# Altium PCB PCB1.PcbDoc (part 1 of 3)
Units mil, origin at the board's own origin, x right, y up, seen from the top; angles counter-clockwise.
Board outline 5410 x 4000 mil, 10 copper layers (Top Layer 1, Top Layer, Layer 5, Layer 3, Layer 1, Layer 2, Layer 4, Layer 6, Bottom Layer, Bottom Layer 1), stack 48.824 mil thick; 53 components, 189 nets, 458 pads, 144 vias.
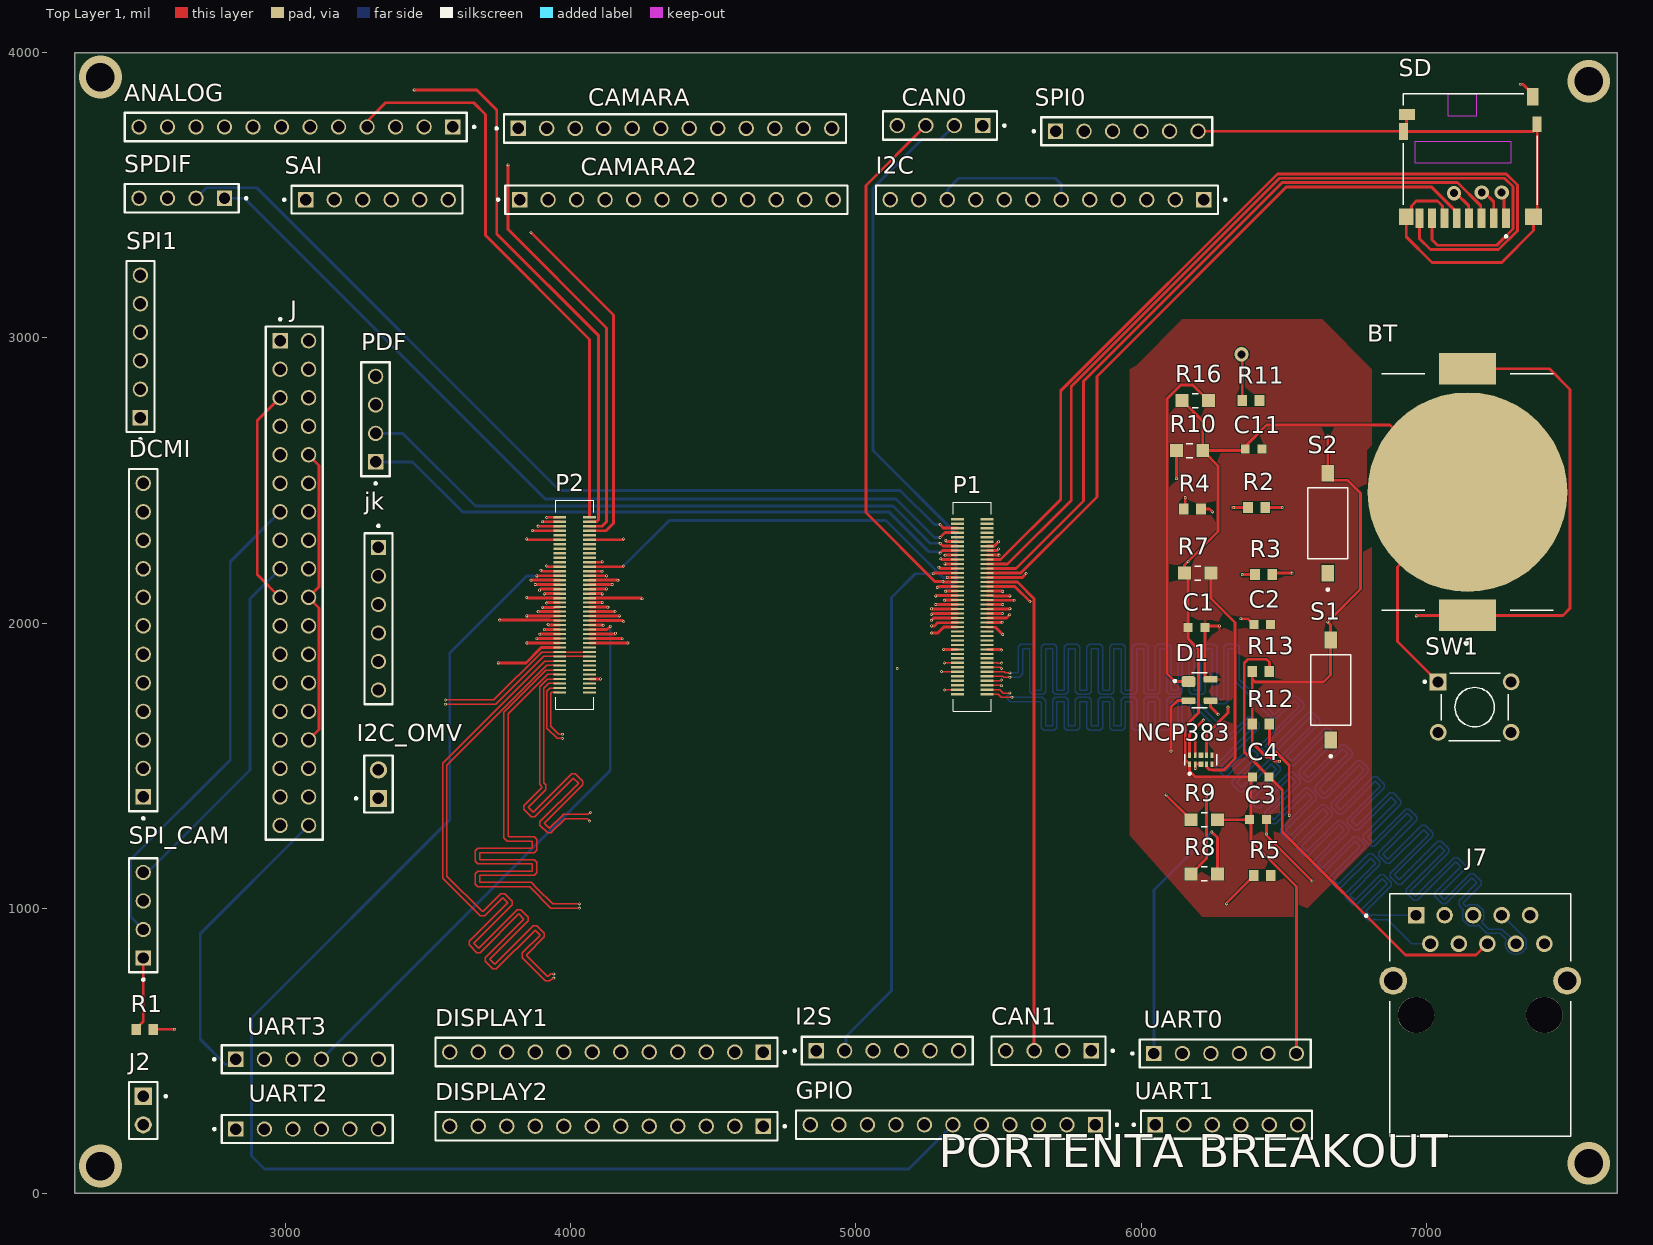
[diagram p0: Top Layer 1 view]
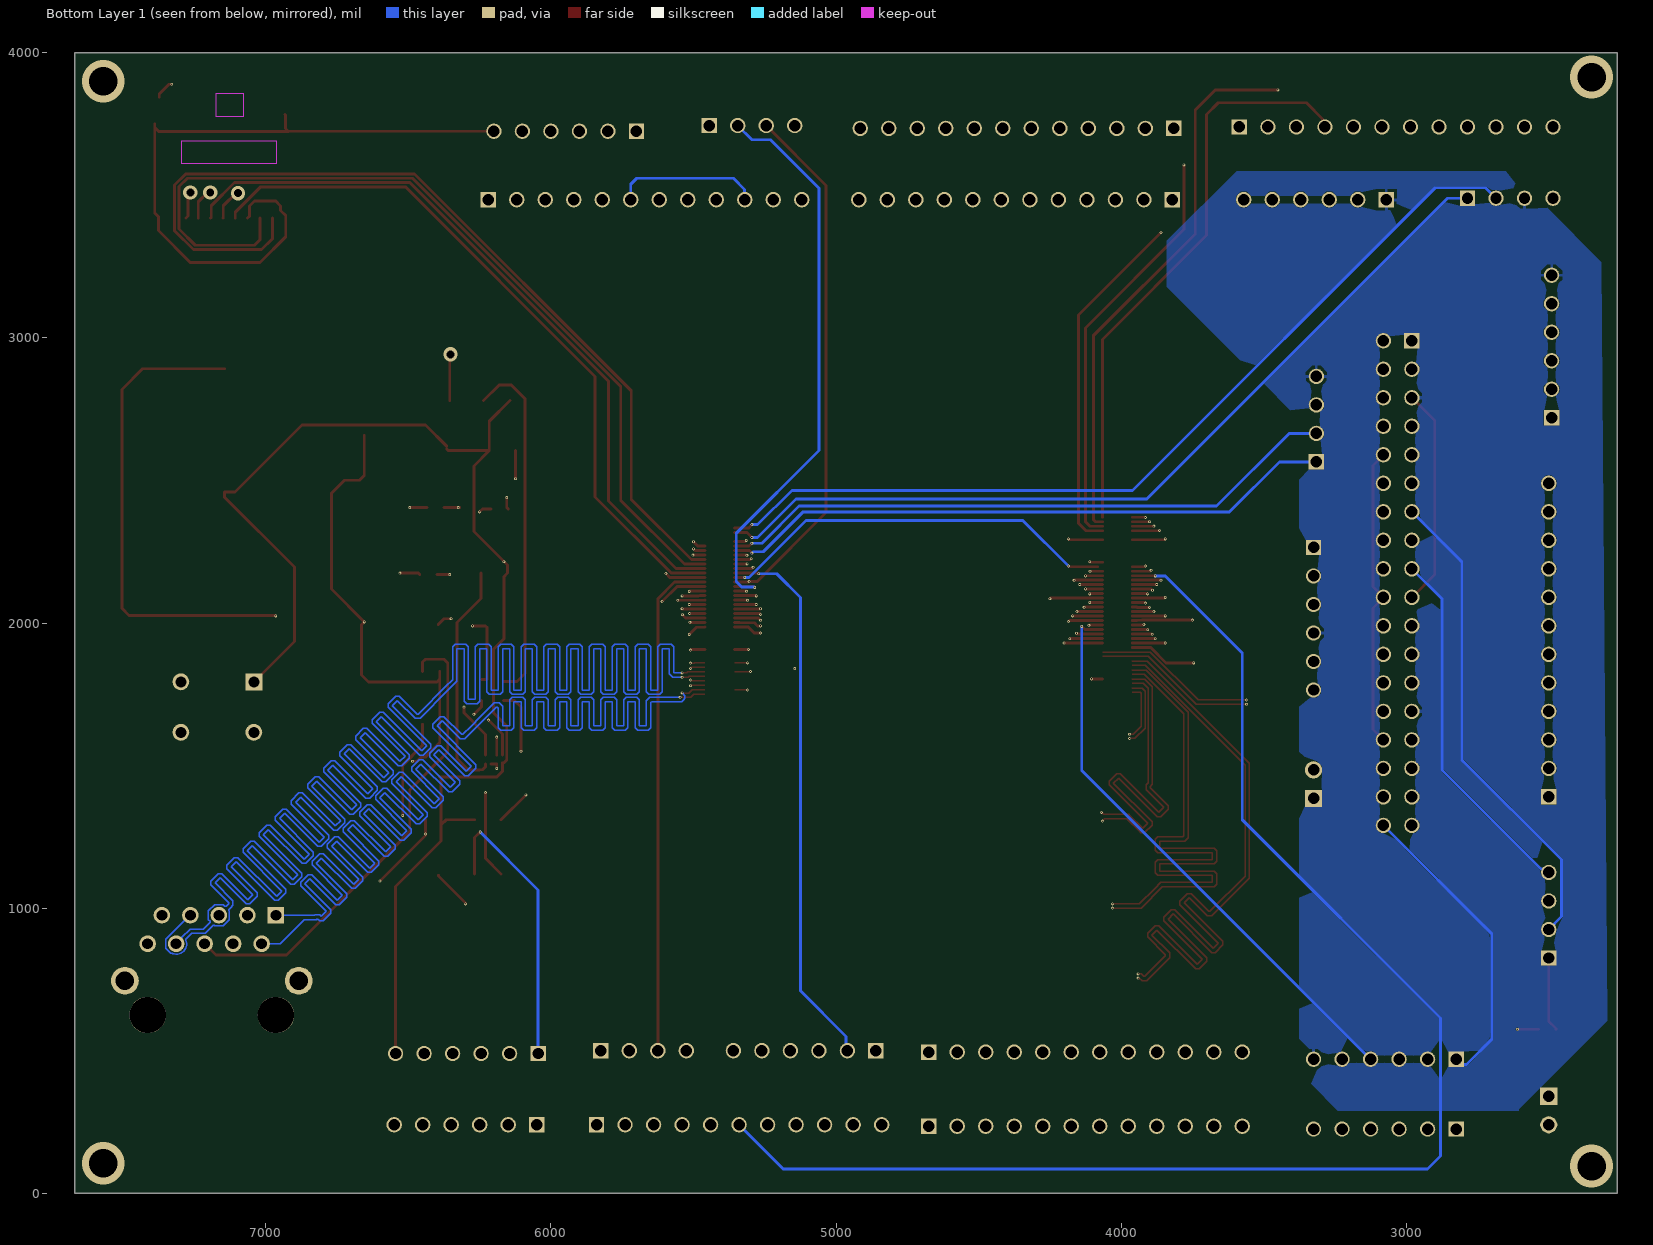
[diagram p1: Bottom Layer 1 view, seen from below]
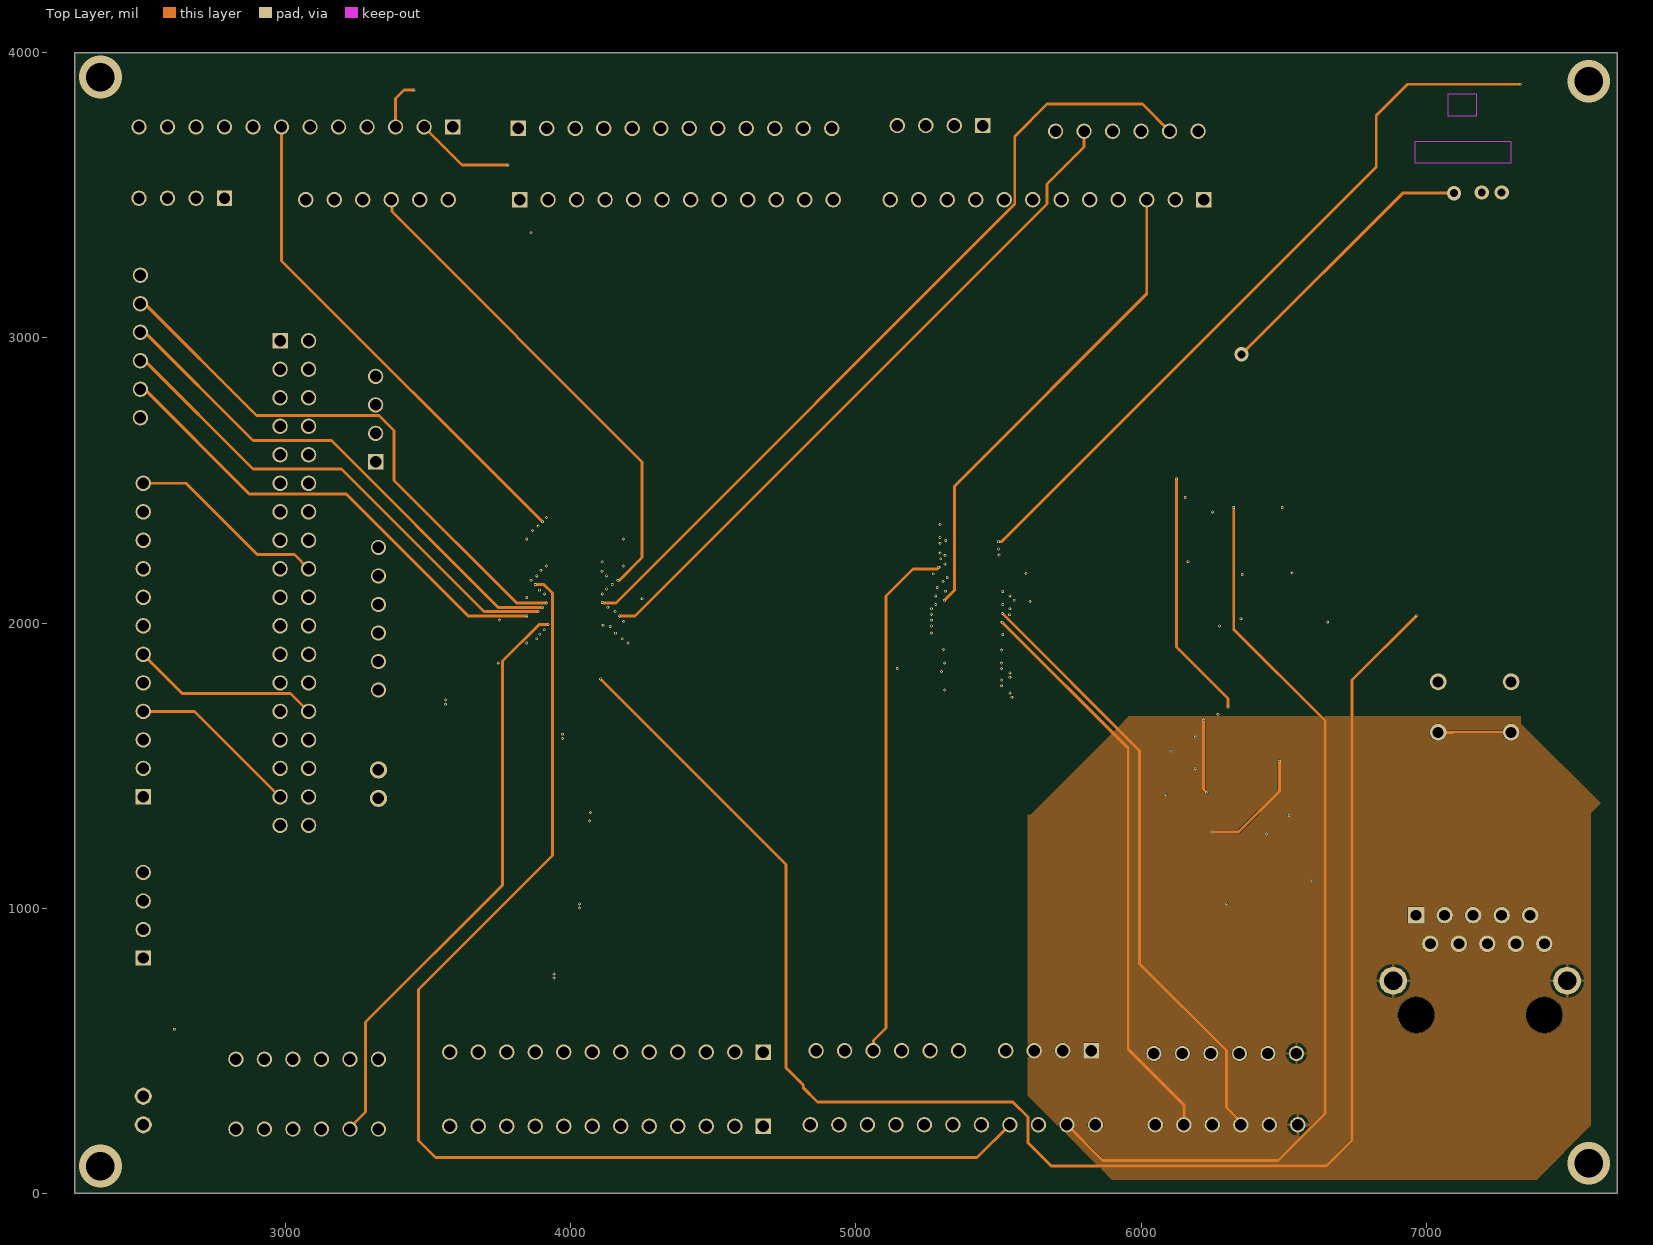
[diagram p2: Top Layer]
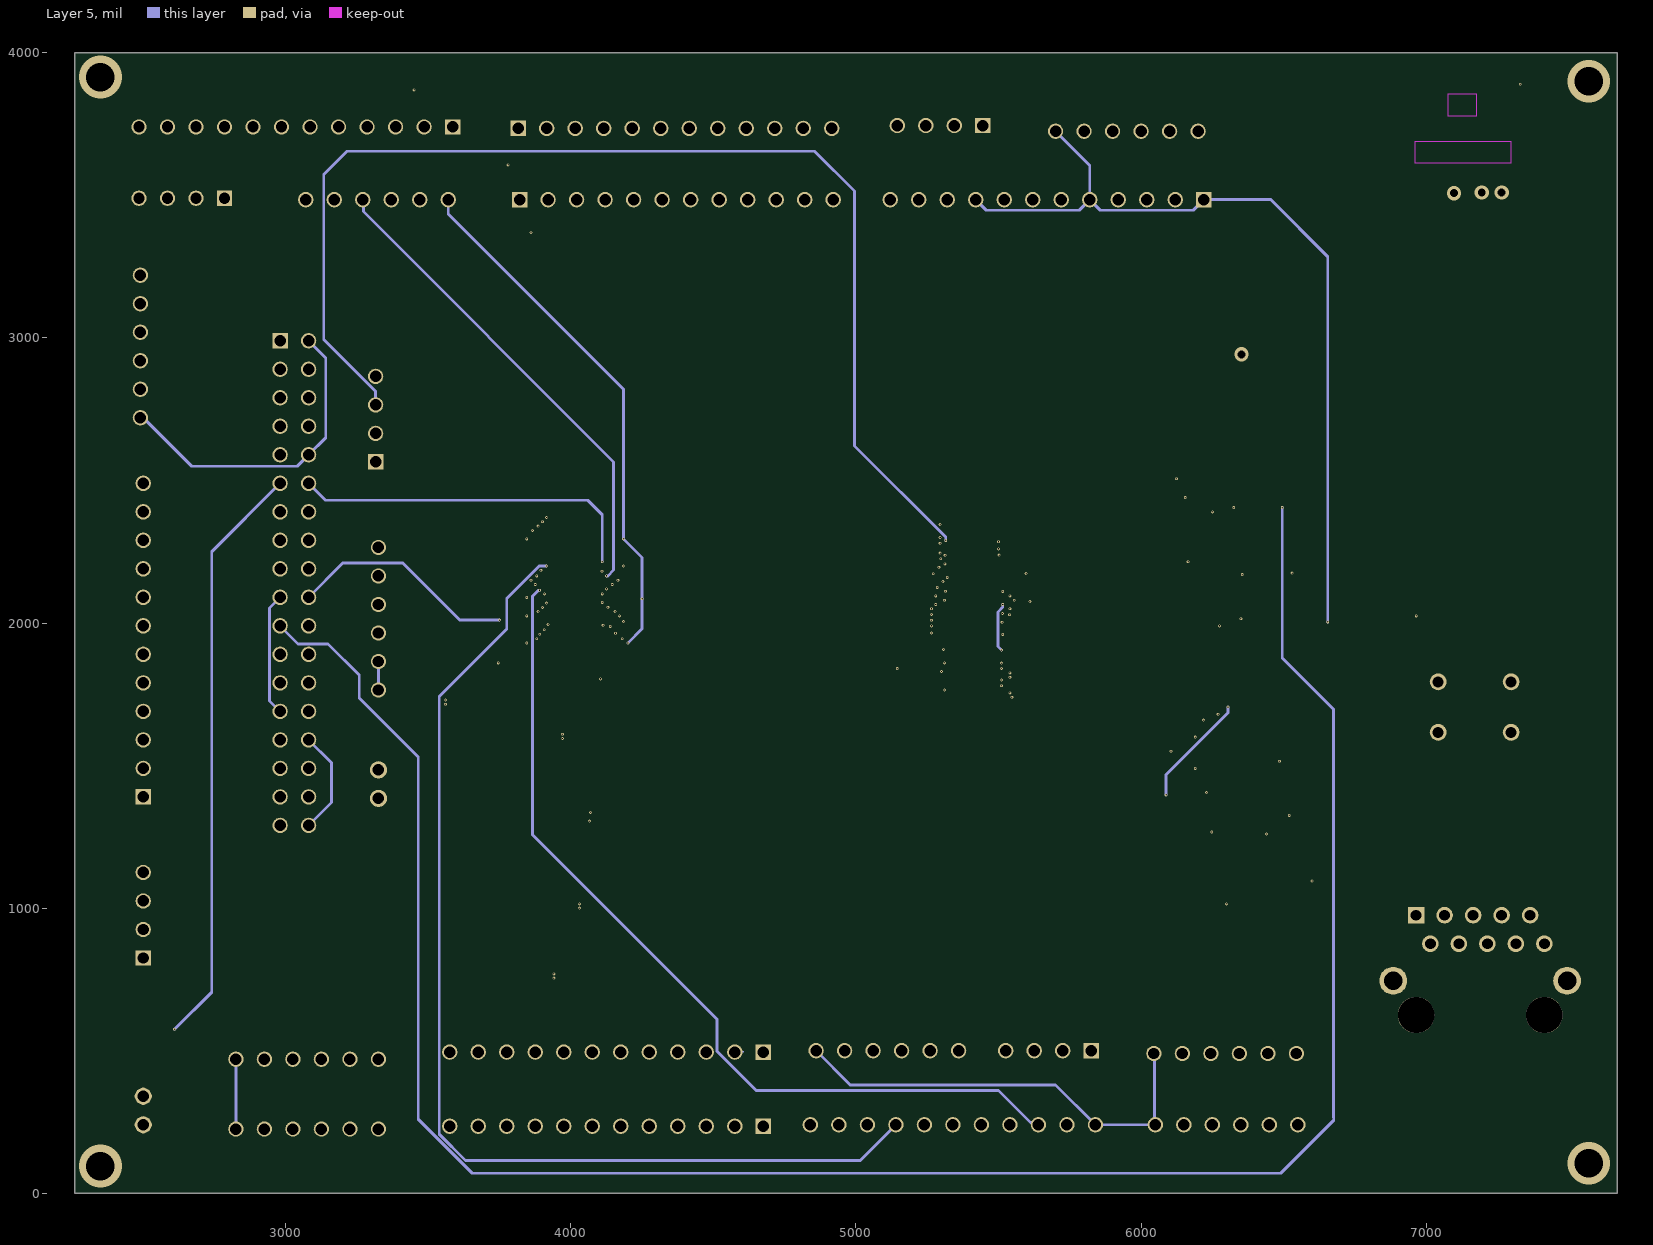
[diagram p3: Layer 5]
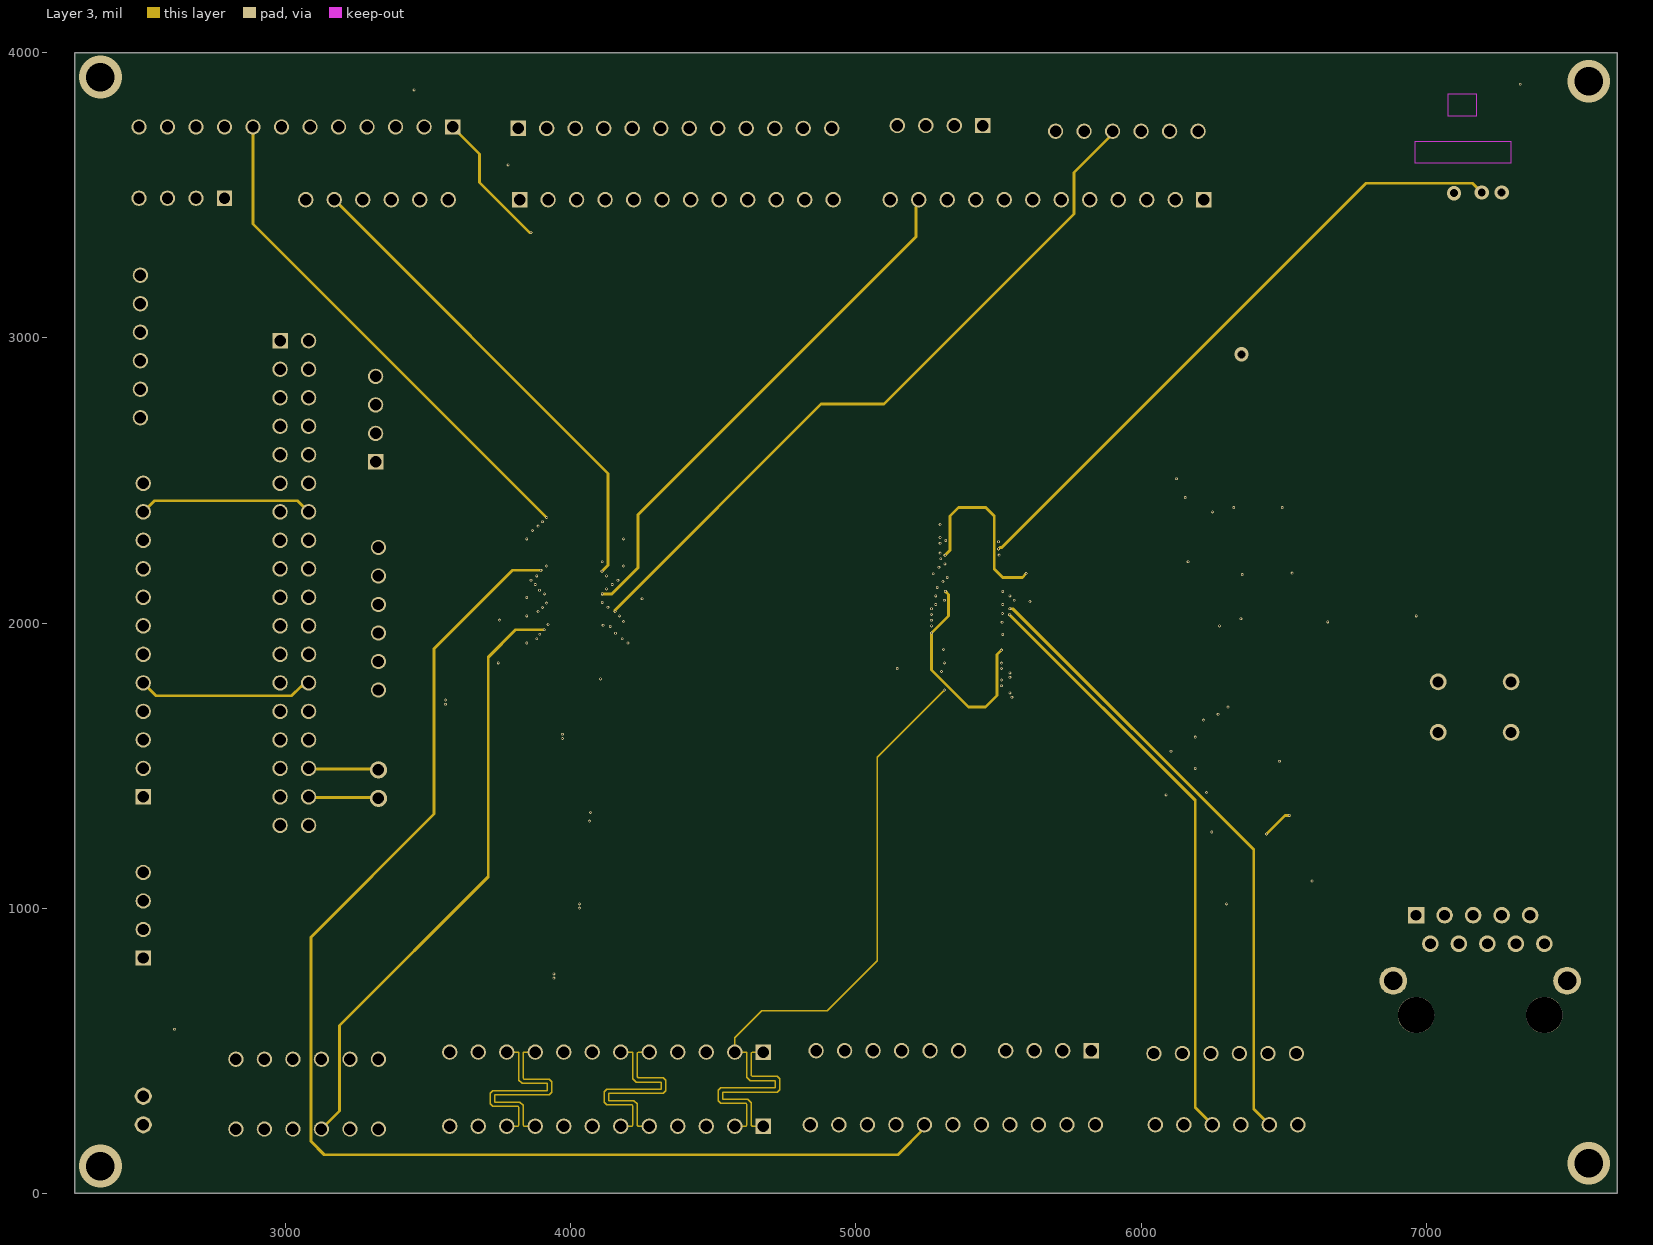
[diagram p4: Layer 3]
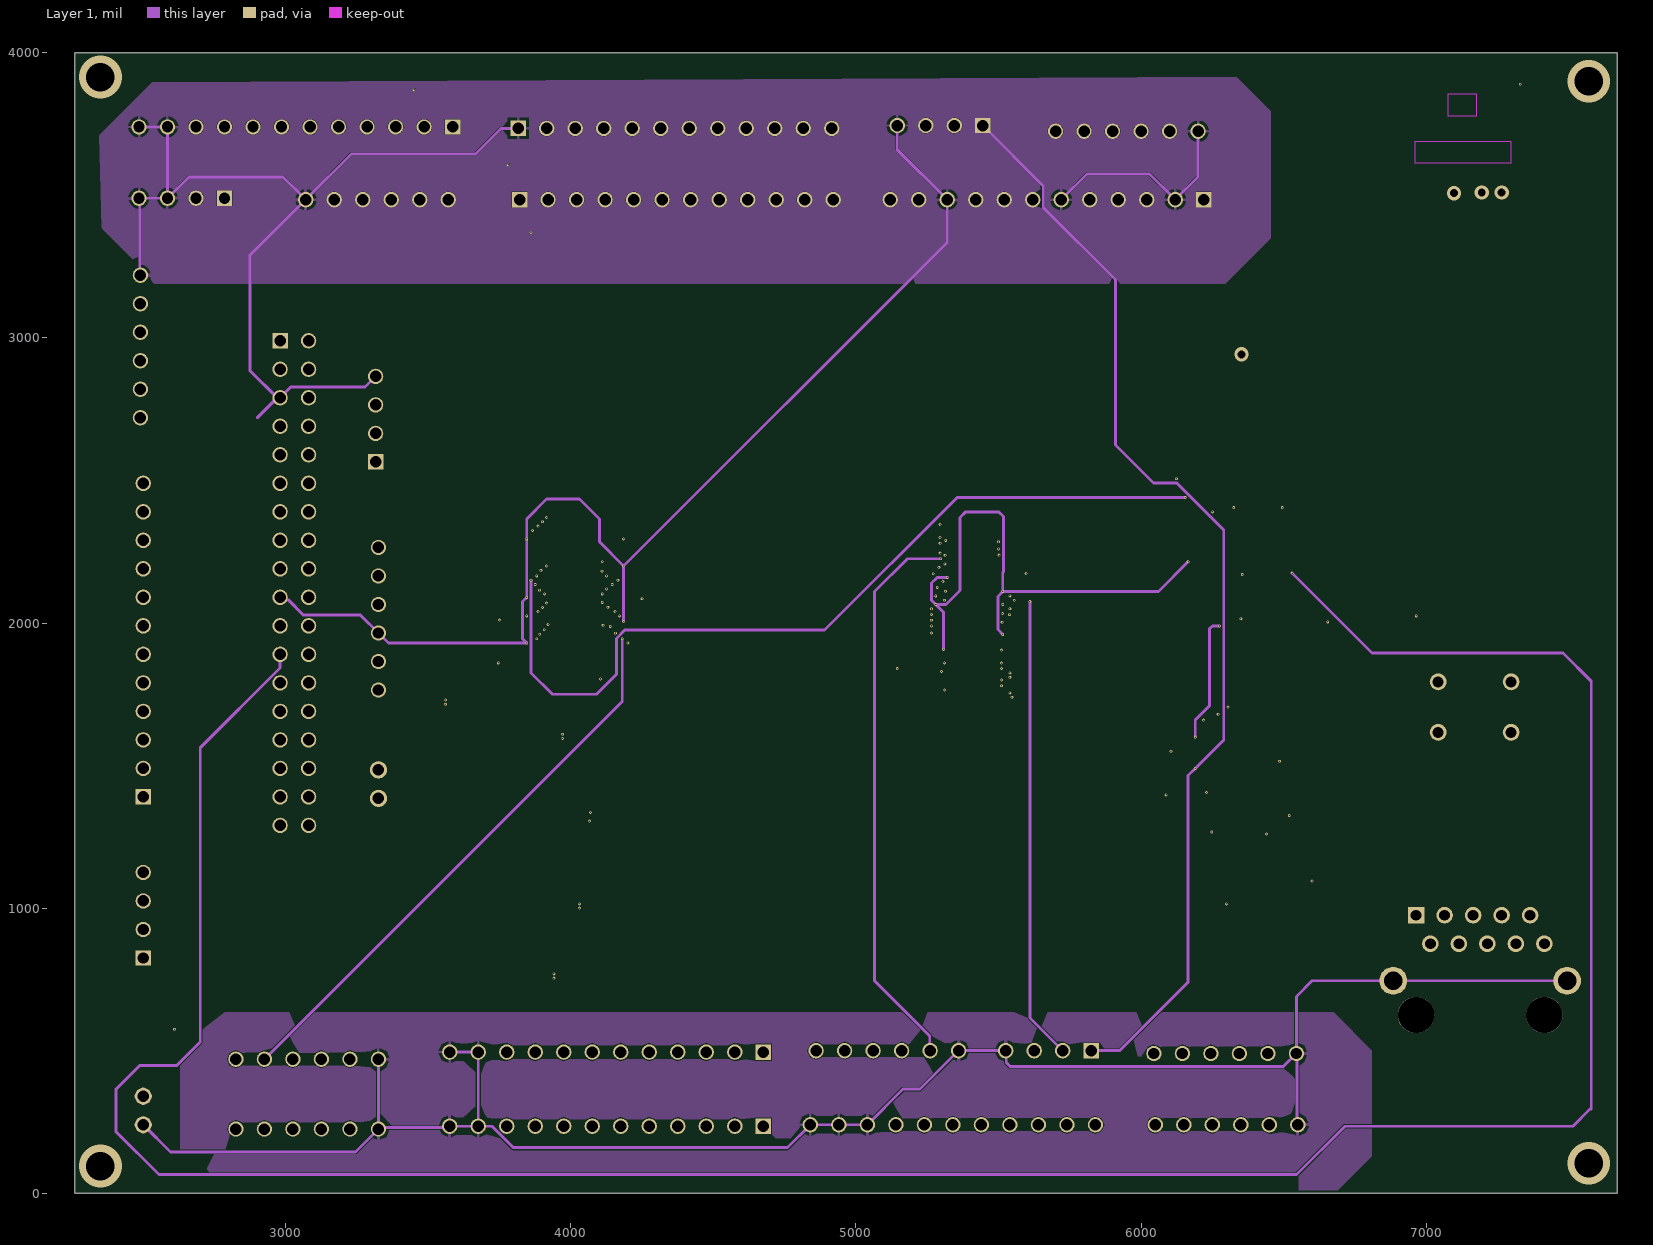
[diagram p5: Layer 1]
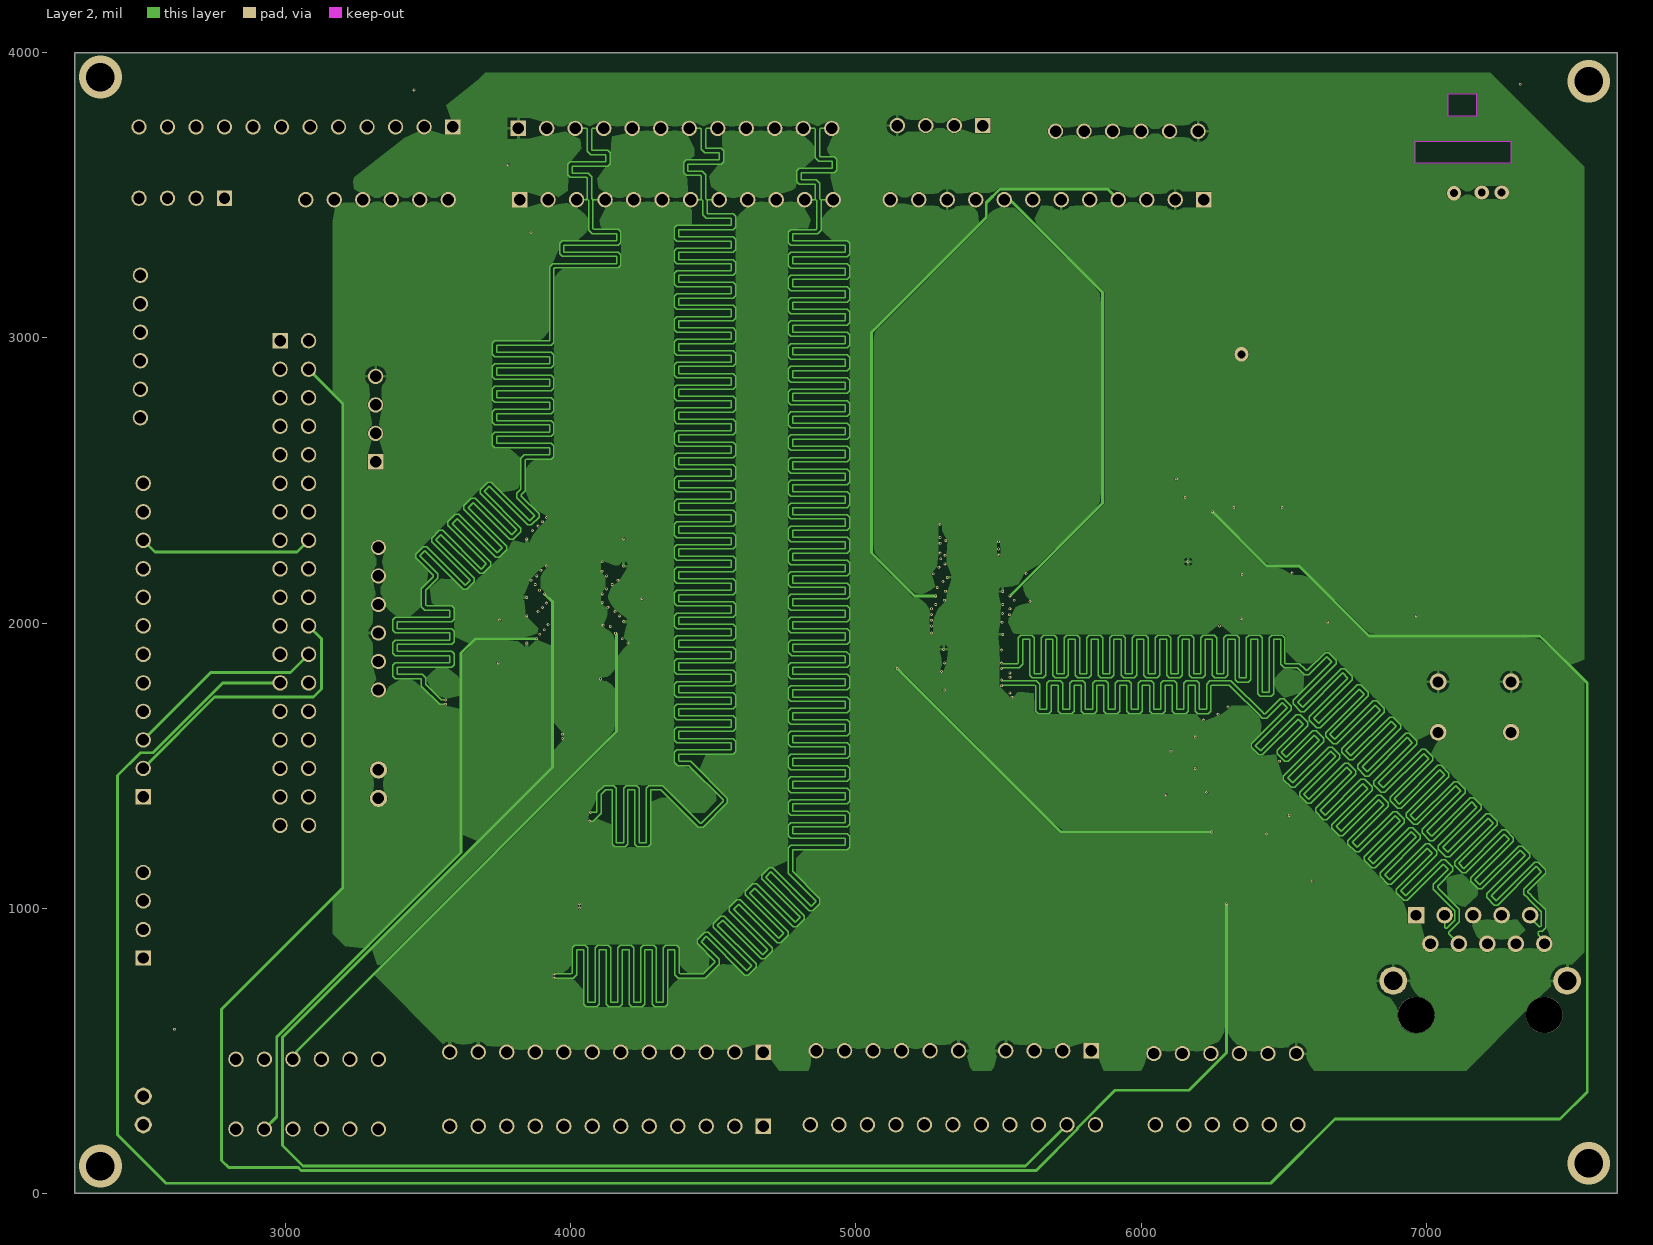
[diagram p6: Layer 2]
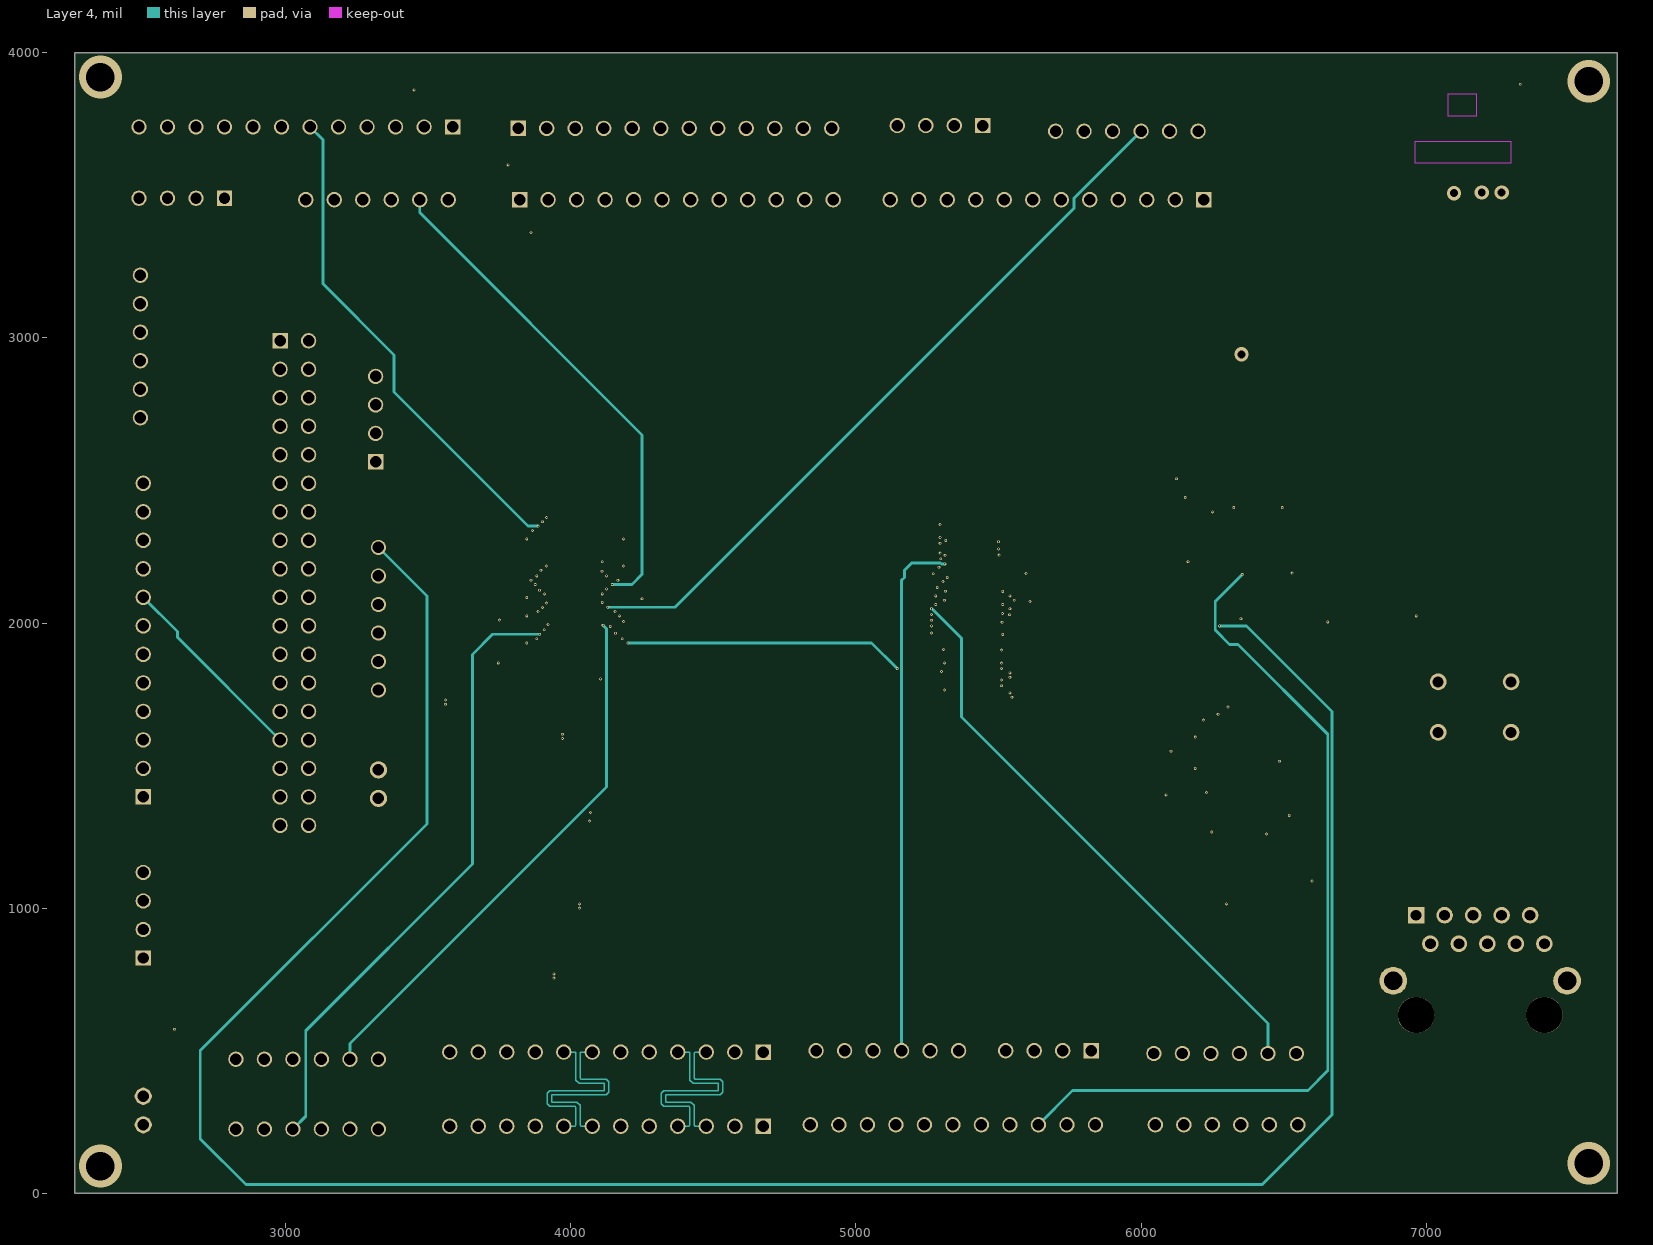
[diagram p7: Layer 4]
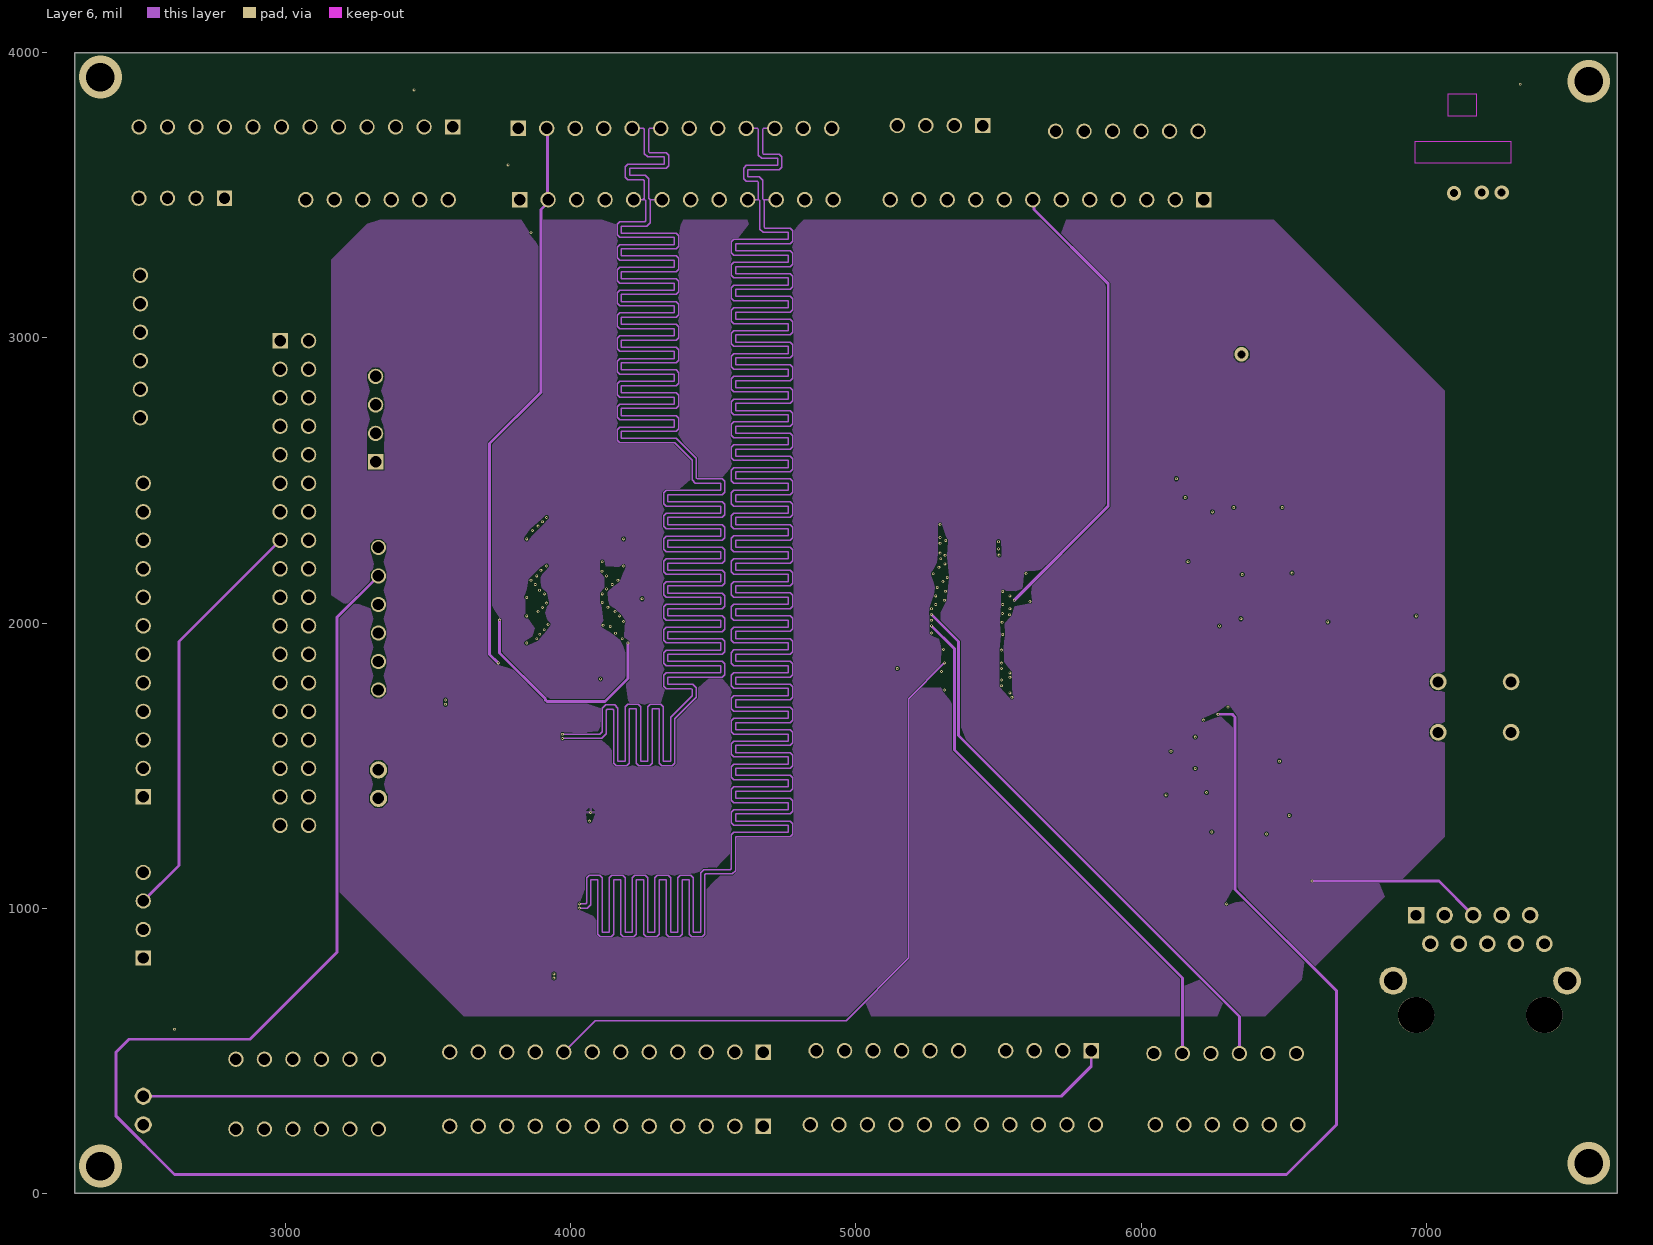
[diagram p8: Layer 6]
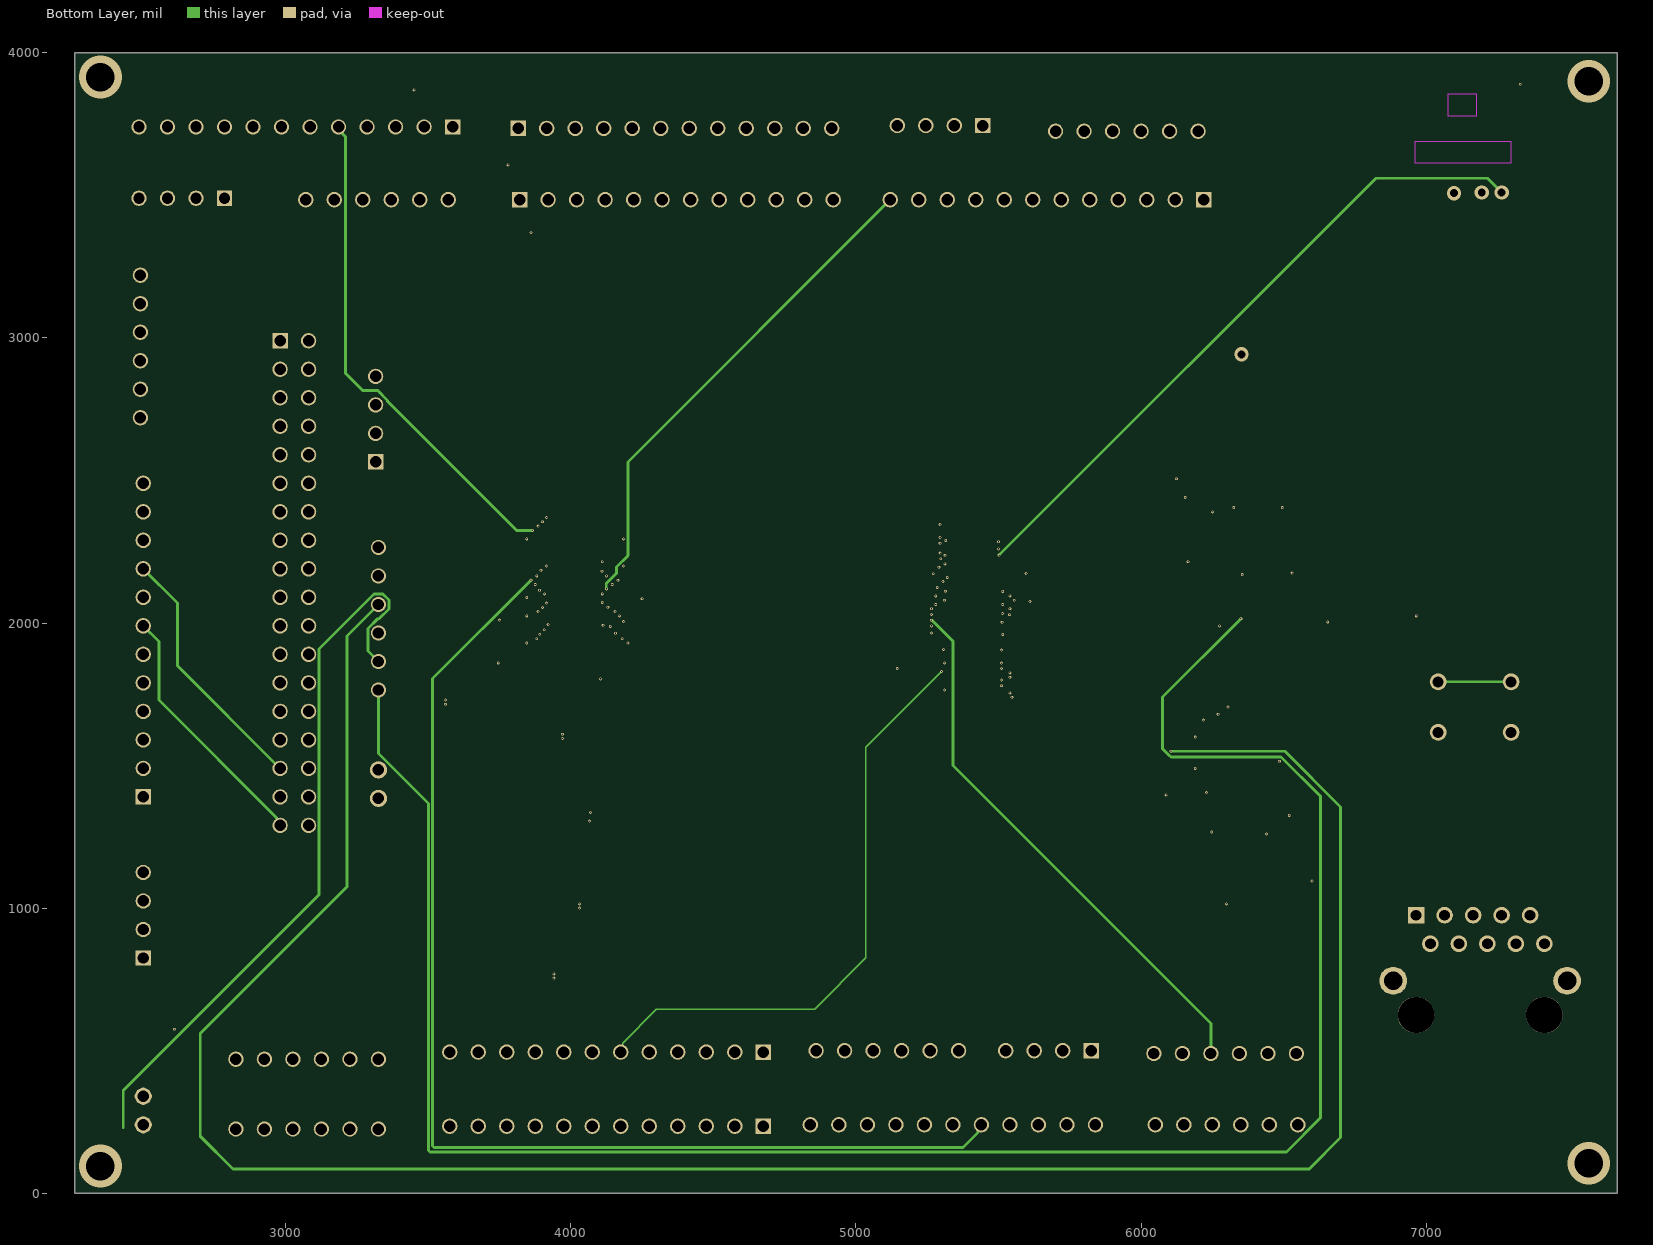
[diagram p9: Bottom Layer]

## Layer stack, top to bottom
Top Solder: solder mask 0.4, Solder Resist, Dk 3.5
Top Layer 1: signal copper 1.378
Dielectric 4: prepreg 2.8, PP-006, Dk 4.1
Top Layer: signal copper 1.4
Dielectric 2: prepreg 2.8, PP-006, Dk 4.1
Layer 5: signal copper 1.378
Dielectric 8: prepreg 2.8, PP-006, Dk 4.1
Layer 3: signal copper 1.378
Dielectric 6: prepreg 2.8, PP-006, Dk 4.1
Layer 1: signal copper 1.378
Dielectric 1: dielectric 12.6, FR-4, Dk 4.8
Layer 2: signal copper 1.378
Dielectric 7: prepreg 2.8, PP-006, Dk 4.1
Layer 4: signal copper 1.378
Dielectric 9: prepreg 2.8, PP-006, Dk 4.1
Layer 6: signal copper 1.378
Dielectric 3: prepreg 2.8, PP-006, Dk 4.1
Bottom Layer: signal copper 1.4
Dielectric 5: prepreg 2.8, PP-006, Dk 4.1
Bottom Layer 1: signal copper 1.378
Bottom Solder: solder mask 0.4, Solder Resist, Dk 3.5

## Board outline
2260,0 7670,0 7670,4000 2260,4000

## Design rules (kind name [scope] priority, off if disabled: settings)
Clearance Clearance_1 [All] p1: gap=0 ignorepadtopadclearanceinfootprint=FALSE
Clearance [All] p2: gap=3 ignorepadtopadclearanceinfootprint=FALSE
DiffPairsRouting [All] p1: maxlimit=10 minlimit=3 mostfreqgap=10 toplayer_minwidth=5 toplayer_maxwidth=15 toplayer_prefwidth=5 midlayer1_minwidth=5 midlayer1_maxwidth=15 midlayer1_prefwidth=5 midlayer2_minwidth=5 midlayer2_maxwidth=15 midlayer2_prefwidth=5 midlayer3_minwidth=5 midlayer3_maxwidth=15 midlayer3_prefwidth=5 midlayer4_minwidth=5 midlayer4_maxwidth=15 midlayer4_prefwidth=5 midlayer5_minwidth=5 midlayer5_maxwidth=15 midlayer5_prefwidth=5 midlayer6_minwidth=5 midlayer6_maxwidth=15 midlayer6_prefwidth=5 midlayer7_minwidth=5 midlayer7_maxwidth=15 midlayer7_prefwidth=5 midlayer8_minwidth=5 midlayer8_maxwidth=15 midlayer8_prefwidth=5 bottomlayer_minwidth=5 bottomlayer_maxwidth=15 bottomlayer_prefwidth=5 maxuncoupledlength=500
PolygonConnect [All] p1: connectstyle=Relief reliefconductorwidth=10 reliefentries=4 polygonreliefangle="90 Angle" airgapwidth=10
RoutingVias [All] p1: holewidth=5 width=10 viastyle="Through Hole" minholewidth=3 minwidth=5 maxholewidth=28 maxwidth=50
SolderMaskExpansion [All] p1: expansion=4 istentingtop=FALSE
Width [All] p1: maxlimit=40 minlimit=5 preferedwidth=10
29 further rules are at their usual default settings.

## Classes and differential pairs
differential pair USB1_D: +USB1_D_P -USB1_D_N
differential pair USB0_D: +USB0_D_P -USB0_D_N
differential pair ETH_D: +ETH_D_P -ETH_D_N
differential pair ETH_C: +ETH_C_P -ETH_C_N
differential pair ETH_B: +ETH_B_P -ETH_B_N
differential pair ETH_A: +ETH_A_P -ETH_A_N
differential pair DSI_D3: +DSI_D3_P -DSI_D3_N
differential pair DSI_D2: +DSI_D2_P -DSI_D2_N
differential pair DSI_D1: +DSI_D1_P -DSI_D1_N
differential pair DSI_D0: +DSI_D0_P -DSI_D0_N
differential pair DSI_CK: +DSI_CK_P -DSI_CK_N
differential pair DS1_D2: +DS1_D2_P -DS1_D2_N
differential pair DS1_CK: +DS1_CK_P -DS1_CK_N
differential pair CK: +CK_P -CK_N
differential pair CAM_D3: +CAM_D3_P -CAM_D3_N
differential pair CAM_D2: +CAM_D2_P -CAM_D2_N
differential pair CAM_D1: +CAM_D1_P -CAM_D1_N
differential pair CAM_D0: +CAM_D0_P -CAM_D0_N

## Components (designator, comment, footprint, x,y, rotation, side; value= is the part's Value field where it differs from the comment)
ANALOG "TSW-112-05-S-S" SAMTEC_TSW-112-05-S-S 3585,3740 r180 top
BT "BK-912-TR" MPD_BK-912-TR 7145,2459.2 r90 top
C1 "885012206071" WCAP-CSGP_885012206071 6194.53,1985 r0 top
C2 "885012206071" WCAP-CSGP_885012206071 6425,1995 r0 top
C3 "885012206071" WCAP-CSGP_885012206071 6410.47,1310 r0 top
C4 "885012206071" WCAP-CSGP_885012206071 6420,1460 r0 top
C11 "885012206071" WCAP-CSGP_885012206071 6395,2610 r0 top
CAMARA "TSW-112-05-S-S" SAMTEC_TSW-112-05-S-S 3815,3735 r0 top
CAMARA2 "TSW-112-05-S-S" SAMTEC_TSW-112-05-S-S 3820,3485 r0 top
CAN0 "TSW-104-24-G-S" SAMTEC_TSW-104-24-G-S 5445,3745 r180 top
CAN1 "TSW-104-24-G-S" SAMTEC_TSW-104-24-G-S 5825,500 r180 top
D1 "PRTR5V0U2X" SOT190P230X110-4N 6205,1765 r0 top
DCMI "TSW-112-05-S-S" SAMTEC_TSW-112-05-S-S 2500,1390 r90 top
DISPLAY1 "TSW-112-05-S-S" SAMTEC_TSW-112-05-S-S 4675,495 r180 top
DISPLAY2 "TSW-112-05-S-S" SAMTEC_TSW-112-05-S-S 4675,235 r180 top
GPIO "MTSW-111-22-T-S-440" SAMTEC_MTSW-111-22-T-S-440 5340,240 r0 top
I2C "TSW-112-05-S-S" SAMTEC_TSW-112-05-S-S 6220,3485 r180 top
I2C_OMV "DW-01-X-X-D-X" SAMTEC_DW-01-X-X-D-X 3325,1435 r0 top
I2S "HTSW-106-07-S-S-LL" SAMTEC_HTSW-106-07-S-S-LL 5110,500 r180 top
J "TSW-118-15-G-D" SAMTEC_TSW-118-15-G-D 2980,2990 r270 top
J2 "DW-01-X-X-D-X" SAMTEC_DW-01-X-X-D-X 2500,290 r180 top
J7 "SS64100-042F" BEL_SS64100-042F 7189.58,625 r0 top
jk "HTSW-106-07-S-S-LL" SAMTEC_HTSW-106-07-S-S-LL 3325,2015 r90 top
NCP383 "SZESD7104MUTAG" DIO_SZESD7104MUTAG 6209.68,1520.75 r90 top
P1 "DF40C-80DS-0.4V(51)" HRS_DF40C-80DS-0.4V(51) 5408.03,2057.09 r90 top
P2 "DF40C-80DS-0.4V(51)" HRS_DF40C-80DS-0.4V(51) 4013.03,2063.66 r90 top
PDF "TSW-104-24-G-S" SAMTEC_TSW-104-24-G-S 3315,2565 r90 top
R1 "CRCW06030000ZSTA" RESC1508X50N 2505,575 r0 top
R2 "CRCW06030000ZSTA" RESC1508X50N 6405,2405 r0 top
R3 "CRCW06030000ZSTA" RESC1508X50N 6430,2170 r0 top
R4 "CRCW06030000ZSTA" RESC1508X50N 6180,2400 r0 top
R5 "CRCW06030000ZSTA" RESC1508X50N 6424.88,1115 r0 top
R7 "ERJS06J104V" RES_ERJS06J104V 6198.74,2175 r0 top
R8 "ERJS06J104V" RES_ERJS06J104V 6221.26,1120 r0 top
R9 "ERJS06J104V" RES_ERJS06J104V 6221.26,1310 r0 top
R10 "ERJS06J104V" RES_ERJS06J104V 6170,2605 r0 top
R11 "CRCW06030000ZSTA" RESC1508X50N 6385.12,2780 r0 top
R12 "CRCW06030000ZSTA" RESC1508X50N 6420,1645 r0 top
R13 "CRCW06030000ZSTA" RESC1508X50N 6420.12,1830 r0 top
R16 "ERJS06J104V" RES_ERJS06J104V 6190,2780 r0 top
S1 "KAE01SGGT" SW_KAE01SGGT 6665,1765 r90 top
S2 "KAE01SGGT" SW_KAE01SGGT 6655,2350 r90 top
SAI "HTSW-106-07-S-S-LL" SAMTEC_HTSW-106-07-S-S-LL 3320,3485 r180 top
SD "1140084168" AMPHENOL_1140084168 7154.41,3454.53 r0 top
SPDIF "TSW-104-24-G-S" SAMTEC_TSW-104-24-G-S 2785,3490 r180 top
SPI0 "HTSW-106-07-S-S-LL" SAMTEC_HTSW-106-07-S-S-LL 5950,3725 r180 top
SPI1 "HTSW-106-07-S-S-LL" SAMTEC_HTSW-106-07-S-S-LL 2490,2970 r270 top
SPI_CAM "TSW-104-24-G-S" SAMTEC_TSW-104-24-G-S 2500,825 r90 top
SW1 "1825910-6" SW_1825910-6-4 7170,1705 r0 top
UART0 "HTSW-106-07-S-S-LL" SAMTEC_HTSW-106-07-S-S-LL 6295,490 r180 top
UART1 "HTSW-106-07-S-S-LL" SAMTEC_HTSW-106-07-S-S-LL 6300,240 r180 top
UART2 "HTSW-106-07-S-S-LL" SAMTEC_HTSW-106-07-S-S-LL 3075,225 r180 top
UART3 "HTSW-106-07-S-S-LL" SAMTEC_HTSW-106-07-S-S-LL 3075,470 r180 top

## Footprints (in the part's own frame and the unit in brackets; to place one, negate y for a bottom-side part, rotate by r counter-clockwise, add the part's x,y. Pads: shape width x height; smd on the part's side, far side on the other; paste and mask are expansions set on the pad)
AMPHENOL_1140084168 [mm]
  rect 0.7x1.75 smd: 1(3.2,-0.875) 2(2.1,-0.875) 3(1,-0.875) 4(-0.1,-0.875) 5(-1.2,-0.875) 6(-2.3,-0.875) 7(-3.4,-0.875) 8(-4.5,-0.875)
  rect 1x1.55 smd: 9(5.575,9.925)
  rect 1.45x1 smd: 10(-5.625,8.35)
  rect 1.5x1.5 smd: S1(5.65,-0.75)
  rect 1.3x1.5 smd: S2(-5.7,-0.75)
  rect 0.8x1.4 smd: S3(5.975,7.5)
  rect 0.8x1.5 smd: S4(-5.95,6.85)
  Keep-Out Layer region: 0.55,8.2 -1.95,8.2 -1.95,10.2 0.55,10.2
  Keep-Out Layer region: 3.6,4 -4.9,4 -4.9,6 3.6,6
  silkscreen extent -5.97,-2.6 5.97,10.2, body extent -6.02,-11.5 5.99,0.15
BEL_SS64100-042F [mm]
  rect 1.478x1.478 hole 0.97: 1(-5.715,8.89)
  round 1.478 hole 0.97: 2(-4.445,6.35) 3(-3.175,8.89) 4(-1.905,6.35) 5(-0.635,8.89) 6(0.635,6.35) 7(1.905,8.89) 8(3.175,6.35) 9(4.445,8.89) 10(5.715,6.35)
  round 2.475 hole 1.65: S1(-7.745,3.05) S2(7.745,3.05)
  round 3.25 hole 3.25 unplated: ""(-5.715,0) ""(5.715,0)
  silkscreen extent -10.27,-10.8 8.07,10.79, body extent -8,0 8,21.03, height 13.67
DIO_SZESD7104MUTAG [mm]
  rect 0.5x0.25 smd mask+0.05: 1(-0.4,1) 2(-0.4,0.5) 4(-0.4,-0.5) 5(-0.4,-1) 6(0.4,-1) 7(0.4,-0.5) 9(0.4,0.5) 10(0.4,1)
  rect 0.5x0.45 smd mask+0.05: 3(-0.4,0) 8(0.4,0)
  silkscreen extent -1.35,-1.44 0.5,1.44, body extent -0.5,-1.25 0.5,1.25, height 0.55
HRS_DF40C-80DS-0.4V(51) [mm]
  rect 0.2x1.14 smd: 1(-7.8,-1.32) 2(-7.8,1.32) 3(-7.4,-1.32) 4(-7.4,1.32) 5(-7,-1.32) 6(-7,1.32) 7(-6.6,-1.32) 8(-6.6,1.32) 9(-6.2,-1.32) 10(-6.2,1.32) 11(-5.8,-1.32) 12(-5.8,1.32) 13(-5.4,-1.32) 14(-5.4,1.32) 15(-5,-1.32) 16(-5,1.32) 17(-4.6,-1.32) 18(-4.6,1.32) 19(-4.2,-1.32) 20(-4.2,1.32) 21(-3.8,-1.32) 22(-3.8,1.32) 23(-3.4,-1.32) 24(-3.4,1.32) 25(-3,-1.32) 26(-3,1.32) 27(-2.6,-1.32) 28(-2.6,1.32) 29(-2.2,-1.32) 30(-2.2,1.32) 31(-1.8,-1.32) 32(-1.8,1.32) 33(-1.4,-1.32) 34(-1.4,1.32) 35(-1,-1.32) 36(-1,1.32) 37(-0.6,-1.32) 38(-0.6,1.32) 39(-0.2,-1.32) 40(-0.2,1.32) 41(0.2,-1.32) 42(0.2,1.32) 43(0.6,-1.32) 44(0.6,1.32) 45(1,-1.32) 46(1,1.32) 47(1.4,-1.32) 48(1.4,1.32) 49(1.8,-1.32) 50(1.8,1.32) 51(2.2,-1.32) 52(2.2,1.32) 53(2.6,-1.32) 54(2.6,1.32) 55(3,-1.32) 56(3,1.32) 57(3.4,-1.32) 58(3.4,1.32) 59(3.8,-1.32) 60(3.8,1.32) 61(4.2,-1.32) 62(4.2,1.32) 63(4.6,-1.32) 64(4.6,1.32) 65(5,-1.32) 66(5,1.32) 67(5.4,-1.32) 68(5.4,1.32) 69(5.8,-1.32) 70(5.8,1.32) 71(6.2,-1.32) 72(6.2,1.32) 73(6.6,-1.32) 74(6.6,1.32) 75(7,-1.32) 76(7,1.32) 77(7.4,-1.32) 78(7.4,1.32) 79(7.8,-1.32) 80(7.8,1.32)
  silkscreen extent -9.3,-1.69 9.3,1.69
MPD_BK-912-TR [mm]
  rect 2.79x5.08 smd: 1(-10.985,0) 2(10.985,0)
  round 17.78 smd: 3(0,0)
  silkscreen extent -13.59,-7.62 10.54,7.62
RES_ERJS06J104V [mm]
  rect 1.15x1.15 smd: 1(-1.175,0) 2(1.175,0)
  silkscreen extent -0.28,-0.62 0.28,0.62
RESC1508X50N [mm]
  rect 0.86x0.98 smd: 1(-0.765,0) 2(0.765,0)
SAMTEC_DW-01-X-X-D-X [mm]
  rect 1.53x1.53 / inner round 1.53 / far side rect 1.53x1.53 hole 1.02: 01(0,-1.27)
  round 1.53 hole 1.02: 02(0,1.27)
  silkscreen extent -2.1,-2.54 1.27,2.54
SAMTEC_HTSW-106-07-S-S-LL [mm]
  rect 1.37x1.37 / inner round 1.37 / far side rect 1.37x1.37 hole 1.02: 01(6.35,0)
  round 1.37 hole 1.02: 02(3.81,0) 03(1.27,0) 04(-1.27,0) 05(-3.81,0) 06(-6.35,0)
  silkscreen extent -7.62,-1.24 8.37,1.24
SAMTEC_MTSW-111-22-T-S-440 [mm]
  rect 1.37x1.37 / inner round 1.37 / far side rect 1.37x1.37 hole 1.02: 01(12.7,0)
  round 1.37 hole 1.02: 02(10.16,0) 03(7.62,0) 04(5.08,0) 05(2.54,0) 06(0,0) 07(-2.54,0) 08(-5.08,0) 09(-7.62,0) 10(-10.16,0) 11(-12.7,0)
  silkscreen extent -13.97,-1.27 14.72,1.27
SAMTEC_TSW-104-24-G-S [mm]
  rect 1.37x1.37 hole 1.02: 01(0,0)
  round 1.37 hole 1.02: 02(2.54,0) 03(5.08,0) 04(7.62,0)
  silkscreen extent -2.02,-1.27 8.89,1.27
SAMTEC_TSW-112-05-S-S [mm]
  rect 1.37x1.37 hole 1.02: 01(0,0)
  round 1.37 hole 1.02: 02(2.54,0) 03(5.08,0) 04(7.62,0) 05(10.16,0) 06(12.7,0) 07(15.24,0) 08(17.78,0) 09(20.32,0) 10(22.86,0) 11(25.4,0) 12(27.94,0)
  silkscreen extent -2.02,-1.27 29.21,1.27
SAMTEC_TSW-118-15-G-D [mm]
  rect 1.37x1.37 hole 1.02: 01(0,0)
  round 1.37 hole 1.02: 02(0,2.54) 03(2.54,0) 04(2.54,2.54) 05(5.08,0) 06(5.08,2.54) 07(7.62,0) 08(7.62,2.54) 09(10.16,0) 10(10.16,2.54) 11(12.7,0) 12(12.7,2.54) 13(15.24,0) 14(15.24,2.54) 15(17.78,0) 16(17.78,2.54) 17(20.32,0) 18(20.32,2.54) 19(22.86,0) 20(22.86,2.54) 21(25.4,0) 22(25.4,2.54) 23(27.94,0) 24(27.94,2.54) 25(30.48,0) 26(30.48,2.54) 27(33.02,0) 28(33.02,2.54) 29(35.56,0) 30(35.56,2.54) 31(38.1,0) 32(38.1,2.54) 33(40.64,0) 34(40.64,2.54) 35(43.18,0) 36(43.18,2.54)
  silkscreen extent -2.02,-1.27 44.45,3.81
SOT190P230X110-4N [mm]
  rrect50% 1.26x0.99 smd: 1(-0.98,0.75)
  rrect50% 1.26x0.59 smd: 2(-0.98,-0.95) 3(0.98,-0.95) 4(0.98,0.95)
  silkscreen extent -2.3,-1.56 0.7,1.56, body extent -1.15,-1.45 1.15,1.45, height 1.1
SW_1825910-6-4 [mm]
  rect 1.498x1.498 / inner round 1.498 / far side rect 1.498x1.498 hole 0.99: 1(-3.25,2.25)
  round 1.498 hole 0.99: 2(3.25,2.25) 3(-3.25,-2.25) 4(3.25,-2.25)
  silkscreen extent -4.54,-3 3,3, body extent -3,-3.9 3,3.9, height 5.01
SW_KAE01SGGT [mm]
  rect 1.5x1.1 smd: 1(-4.45,0) 2(4.45,0)
  silkscreen extent -6.01,-1.79 3.15,1.79, body extent -4.9,-1.79 4.9,1.79, height 3.13
WCAP-CSGP_885012206071 [mm]
  rect 0.8x0.8 smd: 1(-0.75,0) 2(0.75,0)

## Part data
ANALOG CAMARA CAMARA2 DCMI DISPLAY1 DISPLAY2 GPIO I2C I2S J jk R7 R8 R9 R10 R16 SAI SPI0 SPI1 UART0 UART1 UART2 UART3: Package=None, Availability=Unavailable, Price=None
  ANALOG CAMARA CAMARA2 DCMI DISPLAY1 DISPLAY2 I2C: MP=TSW-112-05-S-S
  GPIO: MP=MTSW-111-22-T-S-440
  I2S jk SAI SPI0 SPI1 UART0 UART1 UART2 UART3: MP=HTSW-106-07-S-S-LL
  J: MF=Samtec, MP=TSW-118-15-G-D
  R7 R8 R9 R10 R16: MP=ERJS06J104V
BT: "Battery Retainer Coin, 20.0mm 1 Cell SMD _SMT_ Tab", Package="MSOP-12 MPD", Digi-Key_Part_Number=BK-912-CT-ND, Digi-Key_Purchase_URL=https://www.digikey.com/product-detail/en/mpd-memory-protection-devices/BK-912-TR/BK-912-CT-ND/2647828?utm_source=snapeda&utm_medium=aggregator&utm_campaign=symbol, MF="MPD _Memory", MP=BK-912-TR, SnapEDA_Link=https://www.snapeda.com/parts/BK-912-TR/MPD%20%28Memory%20Protection%20Devices%29/view-part/229797/?ref=snap
C1 C2 C3 C4 C11: "WCAP-CSGP General Purpose MLCC; SMT 0603; X7R; 100nF 10%; 25V; -55C to +125C; Tech. PN X7R0603104K025DFCT10000", Package="0603 Wurth Electronics", Availability=Warning, Check_prices=https://www.snapeda.com/parts/885012206071/Wurth%20Electronics%20Inc/view-part/4217095/?ref=eda, MF="Wurth Electronics Inc", MP=885012206071, Price=None, Purchase-URL=https://pricing.snapeda.com/search/part/885012206071/?ref=eda, SnapEDA_Link=https://www.snapeda.com/parts/885012206071/Wurth%20Electronics%20Inc/view-part/4217095/?ref=snap
CAN0 CAN1 PDF SPDIF SPI_CAM: "Connector Header Through Hole 4 position 0.100 (2.54mm)", Package=None, Availability=Unavailable, MF=Samtec, MP=TSW-104-24-G-S, Price=None, SnapEDA_Link=https://www.snapeda.com/parts/TSW-104-24-G-S/Samtec/view-part/3451889/?ref=snap
D1: "Nexperia PRTR5V0U2X,215, Dual-Element Uni-Directional TVS Diode, 4-Pin SOT-143B", Package="TO-253-4 Nexperia USA Inc.", Availability="In Stock", Check_prices=https://www.snapeda.com/parts/PRTR5V0U2X/NXP+Semiconductors/view-part/?ref=eda, MF="NXP Semiconductors", MP=PRTR5V0U2X, Price=None, Purchase-URL=https://pricing.snapeda.com/search/part/PRTR5V0U2X/?ref=eda, SnapEDA_Link=https://www.snapeda.com/parts/PRTR5V0U2X/NXP+Semiconductors/view-part/?ref=snap
I2C_OMV J2: "2 Position Header Spacer Connector Tin Through Hole", Package=None, Check_prices=https://www.snapeda.com/parts/DW-01-15-T-D-330/Samtec/view-part/?ref=eda, MF=Samtec, MP=DW-01-15-T-D-330, SnapEDA_Link=https://www.snapeda.com/parts/DW-01-15-T-D-330/Samtec/view-part/?ref=snap
J7: "Modular Jack", Package=None, Check_prices=https://www.snapeda.com/parts/SS64100-042F/Stewart%20Connector/view-part/4629115/?ref=eda, Digi-Key_Part_Number=380-1439-ND, MF="Stewart Connector", MP=SS64100-042F, Purchase-URL=https://pricing.snapeda.com/search/part/SS64100-042F/?ref=eda, SnapEDA_Link=https://www.snapeda.com/parts/SS64100-042F/Stewart%20Connector/view-part/4629115/?ref=snap
NCP383: "ESD Suppressor Diode TVS Bi-Dir 5V 10Vc Automotive 10-Pin UDFN T/R", Package="UDFN-10 ON Semiconductor", Check_prices=https://www.snapeda.com/parts/SZESD7104MUTAG/Onsemi/view-part/?ref=eda, MF=onsemi, MP=SZESD7104MUTAG, SnapEDA_Link=https://www.snapeda.com/parts/SZESD7104MUTAG/Onsemi/view-part/?ref=snap
P1 P2: "80 Position Connector Receptacle, Center Strip Contacts Surface Mount Gold", Package=None, Digi-Key_Part_Number=H11633CT-ND, Digi-Key_Purchase_URL=https://www.digikey.com/product-detail/en/hirose-electric-co-ltd/DF40C-80DS-0.4V_51_/H11633CT-ND/1969512?utm_source=snapeda&utm_medium=aggregator&utm_campaign=symbol, MF=Hirose, MP=DF40C-80DS-0.4V_51_, SnapEDA_Link=https://www.snapeda.com/parts/DF40C-80DS-0.4V%2851%29/Hirose%20Electric%20Co%20Ltd/view-part/175723/?ref=snap
R1 R2 R3 R4 R5 R11 R12 R13: "RES SMD 0.0OHM JUMPER 1/10W 0603", Package=None, Availability=Unavailable, MP=CRCW06030000ZSTA, Price=None
S1 S2: "Dip Switch SPST 1 Position Surface Mount Slide (Standard) Actuator 25mA 24VDC", Package=None, Availability="In Stock", Check_prices=https://www.snapeda.com/parts/KAE01SGGT/E-Switch/view-part/?ref=eda, MF=E-Switch, MP=KAE01SGGT, Price=None, Purchase-URL=https://pricing.snapeda.com/search/part/KAE01SGGT/?ref=eda, SnapEDA_Link=https://www.snapeda.com/parts/KAE01SGGT/E-Switch/view-part/?ref=snap
SD: "10 (8 + 2) Position Card Connector Secure Digital - microSDâ„¢ Surface Mount, Right Angle Gold", Package=None, Availability="In Stock", Check_prices=https://www.snapeda.com/parts/1140084168/Amphenol+FCI/view-part/?ref=eda, MF="Amphenol ICC", MP=1140084168, Price=None, Purchase-URL=https://pricing.snapeda.com/search/part/1140084168/?ref=eda, SnapEDA_Link=https://www.snapeda.com/parts/1140084168/Amphenol+FCI/view-part/?ref=snap
SW1: "Switch Push Button OFF (ON) SPST Round Button 0.05A 24VDC Momentary Contact PC Pins Thru-Hole", Package=None, Check_prices=https://www.snapeda.com/parts/1825910-6/TE+Connectivity+ALCOSWITCH+Switches/view-part/?ref=eda, Digi-Key_Part_Number=450-1650-ND, MF="TE Connectivity", MP=1825910-6, Purchase-URL=https://pricing.snapeda.com/search/part/1825910-6/?ref=eda, SnapEDA_Link=https://www.snapeda.com/parts/1825910-6/TE+Connectivity+ALCOSWITCH+Switches/view-part/?ref=snap

## Via types
v1: diameter 10, hole 5, Top Layer 1 to Bottom Layer 1, 136 vias
v2: diameter 150, hole 100, Top Layer 1 to Bottom Layer 1, 4 vias
v3: diameter 50, hole 28, Top Layer 1 to Bottom Layer 1, 4 vias

## Nets (pads, with @x,y where several pads share a name; then routed paths per layer and width w, separated by ;. In a path a pad name is that pad's centre, name@x,y a point inside that pad or via, vN(x,y) a via of type N, cw(c..) or ccw(c..) an arc to the next point about the centre after c; other vN are vias at no path point)
+5V: CAN0.01 CAN1.01 J2.01 NCP383.2 NCP383.3 | length 7351.9
  Top Layer 1 w10: v1(6190,1490) NCP383.2@6190,1505 NCP383.3@6209.68,1505
  Layer 1 w10: CAN0.01@5445,3745 5656.97,3533.03 5656.97,3458.03 5910,3205 5910,2625 6044,2491 6125.21,2491 6290,2326.21 6290,1590 v1(6190,1490) 6165,1465 6165,740 5925,500 CAN1.01@5825,500
  Layer 6 w10: J2.01@2500,340 5720,340 5825,445 CAN1.01@5825,500
A0: ANALOG.01 P2.73 | length 1722.9
  Top Layer 1 w10: v1(3860,3370) 4150,3080 4150,2350 4123.5,2323.5 P2.73@4065,2323.5
  Layer 3 w10: ANALOG.01@3585,3740 3680,3645 3680,3545 3855,3370 v1(3860,3370)
A1: ANALOG.02 P2.75 | length 1811.5
  Top Layer 1 w10: v1(3780,3606.94) 3780,3380 4125,3035 4125,2355 4109.25,2339.25 P2.75@4065,2339.25
  Top Layer w10: ANALOG.02@3485,3740 3618.06,3606.94 v1(3780,3606.94)
A2: ANALOG.03 P2.77 | length 2117.4
  Top Layer 1 w10: v1(3450,3870) 3670,3870 3740,3800 3740,3365 4097.44,3007.56 4097.44,2362.67 4089.77,2355 P2.77@4065,2355
  Top Layer w10: ANALOG.03@3385,3740 3385,3840 3415,3870 v1(3450,3870)
A3: ANALOG.04 P2.79 | length 2043.4
  Top Layer 1 w10: ANALOG.04@3285,3740 3293.41,3748.41 3293.41,3768.41 3350,3825 3659.14,3825 3700,3784.14 3700,3360 4065,2995 P2.79@4065,2370.75
A4: ANALOG.05 P2.74 | length 1856.2
  Top Layer 1 w10: v1(3865,2325) 3866.5,2323.5 P2.74@3961.06,2323.5
  Bottom Layer w10: ANALOG.05@3185,3740 3185,3730 3210,3705 3210,2875 3270,2815 3322.28,2815 3356.97,2780.31 3356.97,2778.03 3810,2325 v1(3865,2325)
A5: ANALOG.06 P2.76 | length 1828.2
  Top Layer 1 w10: v1(3885,2340) 3885.75,2339.25 P2.76@3961.06,2339.25
  Layer 4 w10: ANALOG.06@3085,3740 3130,3695 3130,3190 3380,2940 3380,2810 3850,2340 v1(3885,2340)
A6: ANALOG.07 P2.78 | length 1825.1
  Top Layer 1 w10: v1(3900,2355) P2.78@3961.06,2355
  Top Layer w10: ANALOG.07@2985,3740 2985,3270 v1(3900,2355)
A7: ANALOG.08 P2.80 | length 1843
  Top Layer 1 w10: v1(3915,2370) 3915.75,2370.75 P2.80@3961.06,2370.75
  Layer 3 w10: ANALOG.08@2885,3740 2885,3400 v1(3915,2370)
A8: ANALOG.09
A9: ANALOG.10
AREF_N: P2.72
AREF_P: P2.71
BOOT: S1.1
BT_SEL: S2.1
CAM_D0_N: CAMARA2.12 CAMARA.12 P2.16 | length 20751.3
  Top Layer 1 w5: v1(3940.61,754.39) 3935.61,754.39 3926.64,745.43 3910.07,745.43 3865.25,790.25 3860.38,795.13 3829.4,826.1 3829.4,842.67 3891.83,905.1 3874.15,922.77 3738.94,787.56 3726.52,787.56 3700.05,814.03 3700.05,826.46 3835.26,961.66 3817.58,979.34 3682.37,844.13 3669.95,844.13 3643.48,870.6 3643.48,883.02 3778.69,1018.23 3761.01,1035.91 3698.59,973.48 3682.02,973.48 3677.63,977.88 3672.75,982.75 3550,1105.5 3550,1507.65 3908.79,1866.44 3960.69,1866.44 P2.16@3961.06,1866.81
  Layer 2 w5: v1(3940.61,754.39) 4008.11,754.39 4019.82,766.11 4019.82,854.39 4044.82,854.39 4044.82,663.18 4053.61,654.39 4091.04,654.39 4099.82,663.18 4099.82,854.39 4124.82,854.39 4124.82,663.18 4133.61,654.39 4171.04,654.39 4179.82,663.18 4179.82,854.39 4204.82,854.39 4204.82,663.18 4213.61,654.39 4251.04,654.39 4259.82,663.18 4259.82,854.39 4284.82,854.39 4284.82,663.18 4293.61,654.39 4331.04,654.39 4339.82,663.18 4339.82,854.39 4364.82,854.39 4364.82,766.11 4376.54,754.39 4470.61,754.39 4520.03,803.82 4520.03,820.39 4457.61,882.82 4475.29,900.49 4610.49,765.29 4622.92,765.29 4649.38,791.75 4649.38,804.18 4514.18,939.38 4531.85,957.06 4667.06,821.85 4679.49,821.85 4705.95,848.32 4705.95,860.74 4570.74,995.95 4588.42,1013.63 4723.63,878.42 4736.06,878.42 4762.52,904.89 4762.52,917.31 4627.31,1052.52 4644.99,1070.2 4780.2,934.99 4792.63,934.99 4819.09,961.46 4819.09,973.88 4683.88,1109.09 4701.56,1126.77 4836.77,991.56 4849.19,991.56 4869.19,1011.56 4873.59,1015.95 4873.59,1032.52 4777.5,1128.61 4777.5,1205.18 4877.5,1205.18 4968.71,1205.18 4977.5,1213.96 4977.5,1251.39 4968.71,1260.18 4877.5,1260.18 4777.5,1260.18 4777.5,1285.18 4877.5,1285.18 4968.71,1285.18 4977.5,1293.96 4977.5,1331.39 4968.71,1340.18 4877.5,1340.18 4777.5,1340.18 4777.5,1365.18 4877.5,1365.18 4968.71,1365.18 4977.5,1373.96 4977.5,1411.39 4968.71,1420.18 4877.5,1420.18 4777.5,1420.18 4777.5,1445.18 4877.5,1445.18 4968.71,1445.18 4977.5,1453.96 4977.5,1491.39 4968.71,1500.18 4877.5,1500.18 4777.5,1500.18 4777.5,1525.18 4877.5,1525.18 4968.71,1525.18 4977.5,1533.96 4977.5,1571.39 4968.71,1580.18 4877.5,1580.18 4777.5,1580.18 4777.5,1605.18 4877.5,1605.18 4968.71,1605.18 4977.5,1613.96 4977.5,1651.39 4968.71,1660.18 4877.5,1660.18 4777.5,1660.18 4777.5,1685.18 4877.5,1685.18 4968.71,1685.18 4977.5,1693.96 4977.5,1731.39 4968.71,1740.18 4877.5,1740.18 4777.5,1740.18 4777.5,1765.18 4877.5,1765.18 4968.71,1765.18 4977.5,1773.96 4977.5,1811.39 4968.71,1820.18 4877.5,1820.18 4777.5,1820.18 4777.5,1845.18 4877.5,1845.18 4968.71,1845.18 4977.5,1853.96 4977.5,1888.28 4965.78,1900 4877.5,1900 4780.43,1900 4777.5,1902.93 4777.5,1925.18 4877.5,1925.18 4968.71,1925.18 4977.5,1933.96 4977.5,1971.39 4968.71,1980.18 4877.5,1980.18 4777.5,1980.18 4777.5,2005.18 4877.5,2005.18 4968.71,2005.18 4977.5,2013.96 4977.5,2051.39 4968.71,2060.18 4877.5,2060.18 4777.5,2060.18 4777.5,2085.18 4877.5,2085.18 4968.71,2085.18 4977.5,2093.96 4977.5,2131.39 4968.71,2140.18 4877.5,2140.18 4777.5,2140.18 4777.5,2165.18 4877.5,2165.18 4968.71,2165.18 4977.5,2173.96 4977.5,2211.39 4968.71,2220.18 4877.5,2220.18 4777.5,2220.18 4777.5,2245.18 4877.5,2245.18 4968.71,2245.18 4977.5,2253.96 4977.5,2291.39 4968.71,2300.18 4877.5,2300.18 4777.5,2300.18 4777.5,2325.18 4877.5,2325.18 4968.71,2325.18 4977.5,2333.96 4977.5,2371.39 4968.71,2380.18 4877.5,2380.18 4777.5,2380.18 4777.5,2405.18 4877.5,2405.18 4968.71,2405.18 4977.5,2413.96 4977.5,2451.39 4968.71,2460.17 4877.5,2460.17 4777.5,2460.17 4777.5,2485.17 4877.5,2485.17 4968.71,2485.17 4977.5,2493.96 4977.5,2531.39 4968.71,2540.17 4877.5,2540.17 4777.5,2540.17 4777.5,2565.17 4877.5,2565.17 4968.71,2565.17 4977.5,2573.96 4977.5,2611.39 4968.71,2620.17 4877.5,2620.17 4777.5,2620.17 4777.5,2645.17 4877.5,2645.17 4968.71,2645.17 4977.5,2653.96 4977.5,2691.39 4968.71,2700.17 4877.5,2700.17 4777.5,2700.17 4777.5,2725.17 4877.5,2725.17 4968.71,2725.17 4977.5,2733.96 4977.5,2771.39 4968.71,2780.17 4877.5,2780.17 4777.5,2780.17 4777.5,2805.17 4877.5,2805.17 4968.71,2805.17 4977.5,2813.96 4977.5,2851.39 4968.71,2860.17 4877.5,2860.17 4777.5,2860.17 4777.5,2885.17 4877.5,2885.17 4968.71,2885.17 4977.5,2893.96 4977.5,2931.39 4968.71,2940.17 4877.5,2940.17 4777.5,2940.17 4777.5,2965.17 4877.5,2965.17 4968.71,2965.17 4977.5,2973.96 4977.5,3011.39 4968.71,3020.17 4877.5,3020.17 4777.5,3020.17 4777.5,3045.17 4877.5,3045.17 4968.71,3045.17 4977.5,3053.96 4977.5,3091.39 4968.71,3100.17 4877.5,3100.17 4777.5,3100.17 4777.5,3125.17 4877.5,3125.17 4968.71,3125.17 4977.5,3133.96 4977.5,3171.39 4968.71,3180.17 4877.5,3180.17 4777.5,3180.17 4777.5,3205.17 4877.5,3205.17 4968.71,3205.17 4977.5,3213.96 4977.5,3251.39 4968.71,3260.17 4877.5,3260.17 4777.5,3260.17 4777.5,3285.17 4877.5,3285.17 4968.71,3285.17 4977.5,3293.96 4977.5,3331.39 4968.71,3340.17 4877.5,3340.17 4777.5,3340.17 4777.5,3365.17 4865.78,3365.17 4877.5,3376.89 4877.5,3415 4877.5,3482.07 4880.43,3485 ; CAMARA.12@4915,3735 4875.43,3735 4872.5,3732.07 4872.5,3637.75 4875.43,3634.82 4922.93,3634.82 4931.72,3626.04 4931.72,3588.61 4922.93,3579.82 4807.32,3579.82 4807.32,3554.82 4860.78,3554.82 4872.5,3543.11 4872.5,3487.93 4875.43,3485 4880.43,3485 ; CAMARA2.12@4920,3485 4880.43,3485
CAM_D0_P: CAMARA2.11 CAMARA.11 P2.14 | length 20671.7
  Top Layer 1 w5: v1(3940.61,769.39) 3929.39,769.39 3920.43,760.43 3916.29,760.43 3844.4,832.31 3844.4,836.46 3906.83,898.88 3906.83,911.31 3880.36,937.77 3867.94,937.77 3732.73,802.56 3715.05,820.24 3850.26,955.45 3850.26,967.88 3823.8,994.34 3811.37,994.34 3676.16,859.13 3658.48,876.81 3793.69,1012.02 3793.69,1024.45 3767.23,1050.91 3754.8,1050.91 3692.37,988.48 3688.23,988.48 3565,1111.72 3565,1501.44 3915,1851.44 3960.69,1851.44 P2.14@3961.06,1851.06
  Layer 2 w5: v1(3940.61,769.39) 4001.89,769.39 4004.82,772.32 4004.82,860.61 4013.61,869.39 4051.04,869.39 4059.82,860.61 4059.82,669.39 4084.82,669.39 4084.82,860.61 4093.61,869.39 4131.04,869.39 4139.82,860.61 4139.82,669.39 4164.82,669.39 4164.82,860.61 4173.61,869.39 4211.04,869.39 4219.82,860.61 4219.82,669.39 4244.82,669.39 4244.82,860.61 4253.61,869.39 4291.04,869.39 4299.82,860.61 4299.82,669.39 4324.82,669.39 4324.82,860.61 4333.61,869.39 4371.04,869.39 4379.82,860.61 4379.82,772.32 4382.75,769.39 4464.39,769.39 4505.03,810.03 4505.03,814.18 4442.61,876.6 4442.61,889.03 4469.07,915.49 4481.5,915.49 4616.71,780.29 4634.38,797.96 4499.18,933.17 4499.18,945.6 4525.64,972.06 4538.07,972.06 4673.28,836.85 4690.95,854.53 4555.74,989.74 4555.74,1002.17 4582.21,1028.63 4594.64,1028.63 4729.84,893.42 4747.52,911.1 4612.31,1046.31 4612.31,1058.73 4638.78,1085.2 4651.2,1085.2 4786.41,949.99 4804.09,967.67 4668.88,1102.88 4668.88,1115.3 4695.35,1141.77 4707.77,1141.77 4842.98,1006.56 4858.59,1022.17 4858.59,1026.31 4762.5,1122.4 4762.5,1211.39 4771.29,1220.18 4862.5,1220.18 4962.5,1220.18 4962.5,1245.18 4862.5,1245.18 4771.29,1245.18 4762.5,1253.96 4762.5,1291.39 4771.29,1300.18 4862.5,1300.18 4962.5,1300.18 4962.5,1325.18 4862.5,1325.18 4771.29,1325.18 4762.5,1333.96 4762.5,1371.39 4771.29,1380.18 4862.5,1380.18 4962.5,1380.18 4962.5,1405.18 4862.5,1405.18 4771.29,1405.18 4762.5,1413.96 4762.5,1451.39 4771.29,1460.18 4862.5,1460.18 4962.5,1460.18 4962.5,1485.18 4862.5,1485.18 4771.29,1485.18 4762.5,1493.96 4762.5,1531.39 4771.29,1540.18 4862.5,1540.18 4962.5,1540.18 4962.5,1565.18 4862.5,1565.18 4771.29,1565.18 4762.5,1573.96 4762.5,1611.39 4771.29,1620.18 4862.5,1620.18 4962.5,1620.18 4962.5,1645.18 4862.5,1645.18 4771.29,1645.18 4762.5,1653.96 4762.5,1691.39 4771.29,1700.18 4862.5,1700.18 4962.5,1700.18 4962.5,1725.18 4862.5,1725.18 4771.29,1725.18 4762.5,1733.96 4762.5,1771.39 4771.29,1780.18 4862.5,1780.18 4962.5,1780.18 4962.5,1805.18 4862.5,1805.18 4771.29,1805.18 4762.5,1813.96 4762.5,1851.39 4771.29,1860.18 4862.5,1860.18 4962.5,1860.18 4962.5,1882.07 4959.57,1885 4862.5,1885 4774.22,1885 4762.5,1896.72 4762.5,1931.39 4771.29,1940.18 4862.5,1940.18 4962.5,1940.18 4962.5,1965.18 4862.5,1965.18 4771.29,1965.18 4762.5,1973.96 4762.5,2011.39 4771.29,2020.18 4862.5,2020.18 4962.5,2020.18 4962.5,2045.18 4862.5,2045.18 4771.29,2045.18 4762.5,2053.96 4762.5,2091.39 4771.29,2100.18 4862.5,2100.18 4962.5,2100.18 4962.5,2125.18 4862.5,2125.18 4771.29,2125.18 4762.5,2133.96 4762.5,2171.39 4771.29,2180.18 4862.5,2180.18 4962.5,2180.18 4962.5,2205.18 4862.5,2205.18 4771.29,2205.18 4762.5,2213.96 4762.5,2251.39 4771.29,2260.18 4862.5,2260.18 4962.5,2260.18 4962.5,2285.18 4862.5,2285.18 4771.29,2285.18 4762.5,2293.96 4762.5,2331.39 4771.29,2340.18 4862.5,2340.18 4962.5,2340.18 4962.5,2365.18 4862.5,2365.18 4771.29,2365.18 4762.5,2373.96 4762.5,2411.39 4771.29,2420.18 4862.5,2420.18 4962.5,2420.18 4962.5,2445.17 4862.5,2445.17 4771.29,2445.17 4762.5,2453.96 4762.5,2491.39 4771.29,2500.17 4862.5,2500.17 4962.5,2500.17 4962.5,2525.17 4862.5,2525.17 4771.29,2525.17 4762.5,2533.96 4762.5,2571.39 4771.29,2580.17 4862.5,2580.17 4962.5,2580.17 4962.5,2605.17 4862.5,2605.17 4771.29,2605.17 4762.5,2613.96 4762.5,2651.39 4771.29,2660.17 4862.5,2660.17 4962.5,2660.17 4962.5,2685.17 4862.5,2685.17 4771.29,2685.17 4762.5,2693.96 4762.5,2731.39 4771.29,2740.17 4862.5,2740.17 4962.5,2740.17 4962.5,2765.17 4862.5,2765.17 4771.29,2765.17 4762.5,2773.96 4762.5,2811.39 4771.29,2820.17 4862.5,2820.17 4962.5,2820.17 4962.5,2845.17 4862.5,2845.17 4771.29,2845.17 4762.5,2853.96 4762.5,2891.39 4771.29,2900.17 4862.5,2900.17 4962.5,2900.17 4962.5,2925.17 4862.5,2925.17 4771.29,2925.17 4762.5,2933.96 4762.5,2971.39 4771.29,2980.17 4862.5,2980.17 4962.5,2980.17 4962.5,3005.17 4862.5,3005.17 4771.29,3005.17 4762.5,3013.96 4762.5,3051.39 4771.29,3060.17 4862.5,3060.17 4962.5,3060.17 4962.5,3085.17 4862.5,3085.17 4771.29,3085.17 4762.5,3093.96 4762.5,3131.39 4771.29,3140.17 4862.5,3140.17 4962.5,3140.17 4962.5,3165.17 4862.5,3165.17 4771.29,3165.17 4762.5,3173.96 4762.5,3211.39 4771.29,3220.17 4862.5,3220.17 4962.5,3220.17 4962.5,3245.17 4862.5,3245.17 4771.29,3245.17 4762.5,3253.96 4762.5,3291.39 4771.29,3300.17 4862.5,3300.17 4962.5,3300.17 4962.5,3325.17 4862.5,3325.17 4771.29,3325.17 4762.5,3333.96 4762.5,3371.39 4771.29,3380.17 4859.57,3380.17 4862.5,3383.1 4862.5,3415 4862.5,3482.07 4859.57,3485 4854.57,3485 ; CAMARA.11@4815,3735 4854.57,3735 4857.5,3732.07 4857.5,3631.54 4869.22,3619.82 4916.72,3619.82 4916.72,3594.82 4801.11,3594.82 4792.32,3586.04 4792.32,3548.61 4801.11,3539.82 4854.57,3539.82 4857.5,3536.89 4857.5,3487.93 4854.57,3485 ; CAMARA2.11@4820,3485 4854.57,3485
CAM_D1_N: CAMARA2.10 CAMARA.10 P2.12 | length 17881.6
  Top Layer 1 w5: P2.12@3961.06,1835.31 3960.69,1834.94 3912.65,1834.94 3765,1687.29 3765,1246.72 3776.72,1235.01 3865,1235.01 3865,1210.01 3673.79,1210.01 3665,1201.22 3665,1163.8 3673.79,1155.01 3865,1155.01 3865,1130.01 3673.79,1130.01 3665,1121.22 3665,1083.8 3673.79,1075.01 3854.99,1075.01 3930,1000 v1(4030,1000)
  Layer 6 w5: v1(4030,1000) 4058.11,1000 4069.82,1011.72 4069.82,1100 4094.82,1100 4094.82,908.79 4103.61,900 4141.04,900 4149.82,908.79 4149.82,1100 4174.82,1100 4174.82,908.79 4183.61,900 4221.04,900 4229.82,908.79 4229.82,1100 4254.82,1100 4254.82,908.79 4263.61,900 4301.04,900 4309.82,908.79 4309.82,1100 4334.82,1100 4334.82,908.79 4343.61,900 4381.04,900 4389.82,908.79 4389.82,1100 4414.82,1100 4414.82,908.79 4423.61,900 4461.04,900 4469.82,908.79 4469.82,1117.07 4472.75,1120 4565.78,1120 4577.5,1131.72 4577.5,1250.36 4768.71,1250.36 4777.5,1259.14 4777.5,1296.57 4768.71,1305.36 4577.5,1305.36 4577.5,1330.36 4768.71,1330.36 4777.5,1339.14 4777.5,1376.57 4768.71,1385.36 4577.5,1385.36 4577.5,1410.36 4768.71,1410.36 4777.5,1419.14 4777.5,1456.57 4768.71,1465.36 4577.5,1465.36 4577.5,1490.36 4768.71,1490.36 4777.5,1499.14 4777.5,1536.57 4768.71,1545.36 4577.5,1545.36 4577.5,1570.36 4768.71,1570.36 4777.5,1579.14 4777.5,1616.57 4768.71,1625.36 4577.5,1625.36 4577.5,1650.36 4768.71,1650.36 4777.5,1659.14 4777.5,1696.57 4768.71,1705.35 4577.5,1705.35 4577.5,1730.35 4768.71,1730.35 4777.5,1739.14 4777.5,1776.57 4768.71,1785.35 4577.5,1785.35 4577.5,1810.35 4768.71,1810.35 4777.5,1819.14 4777.5,1856.57 4768.71,1865.35 4577.5,1865.35 4577.5,1890.35 4768.71,1890.35 4777.5,1899.14 4777.5,1936.57 4768.71,1945.35 4577.5,1945.35 4577.5,1970.35 4768.71,1970.35 4777.5,1979.14 4777.5,2016.57 4768.71,2025.35 4577.5,2025.35 4577.5,2050.35 4768.71,2050.35 4777.5,2059.14 4777.5,2096.57 4768.71,2105.35 4577.5,2105.35 4577.5,2130.35 4768.71,2130.35 4777.5,2139.14 4777.5,2176.57 4768.71,2185.35 4577.5,2185.35 4577.5,2210.35 4768.71,2210.35 4777.5,2219.14 4777.5,2256.57 4768.71,2265.35 4577.5,2265.35 4577.5,2290.35 4768.71,2290.35 4777.5,2299.14 4777.5,2336.57 4768.71,2345.35 4577.5,2345.35 4577.5,2370.35 4768.71,2370.35 4777.5,2379.14 4777.5,2416.57 4768.71,2425.35 4577.5,2425.35 4577.5,2450.35 4768.71,2450.35 4777.5,2459.14 4777.5,2496.57 4768.71,2505.35 4577.5,2505.35 4577.5,2530.35 4768.71,2530.35 4777.5,2539.14 4777.5,2576.57 4768.71,2585.35 4577.5,2585.35 4577.5,2610.35 4768.71,2610.35 4777.5,2619.14 4777.5,2656.57 4768.71,2665.35 4577.5,2665.35 4577.5,2690.35 4768.71,2690.35 4777.5,2699.14 4777.5,2736.57 4768.71,2745.35 4577.5,2745.35 4577.5,2770.35 4768.71,2770.35 4777.5,2779.14 4777.5,2816.57 4768.71,2825.35 4577.5,2825.35 4577.5,2850.35 4768.71,2850.35 4777.5,2859.14 4777.5,2896.57 4768.71,2905.35 4577.5,2905.35 4577.5,2930.35 4768.71,2930.35 4777.5,2939.14 4777.5,2976.57 4768.71,2985.35 4577.5,2985.35 4577.5,3010.35 4768.71,3010.35 4777.5,3019.14 4777.5,3056.56 4768.71,3065.35 4577.5,3065.35 4577.5,3090.35 4768.71,3090.35 4777.5,3099.14 4777.5,3136.56 4768.71,3145.35 4577.5,3145.35 4577.5,3170.35 4768.71,3170.35 4777.5,3179.14 4777.5,3216.56 4768.71,3225.35 4577.5,3225.35 4577.5,3250.35 4768.71,3250.35 4777.5,3259.14 4777.5,3296.56 4768.71,3305.35 4577.5,3305.35 4577.5,3330.35 4768.71,3330.35 4777.5,3339.14 4777.5,3376.56 4768.71,3385.35 4680.43,3385.35 4677.5,3388.28 4677.5,3482.07 4680.43,3485 ; CAMARA.10@4715,3735 4675.43,3735 4672.5,3732.07 4672.5,3647.75 4675.43,3644.82 4731.05,3644.82 4739.84,3636.04 4739.84,3598.61 4731.05,3589.82 4620.61,3589.82 4620.61,3564.82 4660.78,3564.82 4672.5,3553.11 4672.5,3487.93 4675.43,3485 4680.43,3485 ; CAMARA2.10@4720,3485 4680.43,3485
CAM_D1_P: CAMARA2.09 CAMARA.09 P2.10 | length 17802
  Top Layer 1 w5: P2.10@3961.06,1819.57 3960.69,1819.94 3918.86,1819.94 3780,1681.08 3780,1252.94 3782.93,1250.01 3871.21,1250.01 3880,1241.22 3880,1203.8 3871.21,1195.01 3680,1195.01 3680,1170.01 3871.21,1170.01 3880,1161.22 3880,1123.8 3871.21,1115.01 3680,1115.01 3680,1090.01 3861.2,1090.01 3882.5,1068.71 3936.21,1015 v1(4030,1015)
  Layer 6 w5: v1(4030,1015) 4051.89,1015 4054.82,1017.93 4054.82,1106.21 4063.61,1115 4101.04,1115 4109.82,1106.21 4109.82,915 4134.82,915 4134.82,1106.21 4143.61,1115 4181.04,1115 4189.82,1106.21 4189.82,915 4214.82,915 4214.82,1106.21 4223.61,1115 4261.04,1115 4269.82,1106.21 4269.82,915 4294.82,915 4294.82,1106.21 4303.61,1115 4341.04,1115 4349.82,1106.21 4349.82,915 4374.82,915 4374.82,1106.21 4383.61,1115 4421.04,1115 4429.82,1106.21 4429.82,915 4454.82,915 4454.82,1123.28 4466.54,1135 4559.57,1135 4562.5,1137.93 4562.5,1256.57 4571.29,1265.36 4762.5,1265.36 4762.5,1290.36 4571.29,1290.36 4562.5,1299.14 4562.5,1336.57 4571.29,1345.36 4762.5,1345.36 4762.5,1370.36 4571.29,1370.36 4562.5,1379.14 4562.5,1416.57 4571.29,1425.36 4762.5,1425.36 4762.5,1450.36 4571.29,1450.36 4562.5,1459.14 4562.5,1496.57 4571.29,1505.36 4762.5,1505.36 4762.5,1530.36 4571.29,1530.36 4562.5,1539.14 4562.5,1576.57 4571.29,1585.36 4762.5,1585.36 4762.5,1610.36 4571.29,1610.36 4562.5,1619.14 4562.5,1656.57 4571.29,1665.36 4762.5,1665.36 4762.5,1690.35 4571.29,1690.35 4562.5,1699.14 4562.5,1736.57 4571.29,1745.35 4762.5,1745.35 4762.5,1770.35 4571.29,1770.35 4562.5,1779.14 4562.5,1816.57 4571.29,1825.35 4762.5,1825.35 4762.5,1850.35 4571.29,1850.35 4562.5,1859.14 4562.5,1896.57 4571.29,1905.35 4762.5,1905.35 4762.5,1930.35 4571.29,1930.35 4562.5,1939.14 4562.5,1976.57 4571.29,1985.35 4762.5,1985.35 4762.5,2010.35 4571.29,2010.35 4562.5,2019.14 4562.5,2056.57 4571.29,2065.35 4762.5,2065.35 4762.5,2090.35 4571.29,2090.35 4562.5,2099.14 4562.5,2136.57 4571.29,2145.35 4762.5,2145.35 4762.5,2170.35 4571.29,2170.35 4562.5,2179.14 4562.5,2216.57 4571.29,2225.35 4762.5,2225.35 4762.5,2250.35 4571.29,2250.35 4562.5,2259.14 4562.5,2296.57 4571.29,2305.35 4762.5,2305.35 4762.5,2330.35 4571.29,2330.35 4562.5,2339.14 4562.5,2376.57 4571.29,2385.35 4762.5,2385.35 4762.5,2410.35 4571.29,2410.35 4562.5,2419.14 4562.5,2456.57 4571.29,2465.35 4762.5,2465.35 4762.5,2490.35 4571.29,2490.35 4562.5,2499.14 4562.5,2536.57 4571.29,2545.35 4762.5,2545.35 4762.5,2570.35 4571.29,2570.35 4562.5,2579.14 4562.5,2616.57 4571.29,2625.35 4762.5,2625.35 4762.5,2650.35 4571.29,2650.35 4562.5,2659.14 4562.5,2696.57 4571.29,2705.35 4762.5,2705.35 4762.5,2730.35 4571.29,2730.35 4562.5,2739.14 4562.5,2776.57 4571.29,2785.35 4762.5,2785.35 4762.5,2810.35 4571.29,2810.35 4562.5,2819.14 4562.5,2856.57 4571.29,2865.35 4762.5,2865.35 4762.5,2890.35 4571.29,2890.35 4562.5,2899.14 4562.5,2936.57 4571.29,2945.35 4762.5,2945.35 4762.5,2970.35 4571.29,2970.35 4562.5,2979.14 4562.5,3016.56 4571.29,3025.35 4762.5,3025.35 4762.5,3050.35 4571.29,3050.35 4562.5,3059.14 4562.5,3096.56 4571.29,3105.35 4762.5,3105.35 4762.5,3130.35 4571.29,3130.35 4562.5,3139.14 4562.5,3176.56 4571.29,3185.35 4762.5,3185.35 4762.5,3210.35 4571.29,3210.35 4562.5,3219.14 4562.5,3256.56 4571.29,3265.35 4762.5,3265.35 4762.5,3290.35 4571.29,3290.35 4562.5,3299.14 4562.5,3336.56 4571.29,3345.35 4762.5,3345.35 4762.5,3370.35 4674.22,3370.35 4662.5,3382.07 4662.5,3482.07 4659.57,3485 4654.57,3485 ; CAMARA.09@4615,3735 4654.57,3735 4657.5,3732.07 4657.5,3641.54 4669.22,3629.82 4724.84,3629.82 4724.84,3604.82 4614.4,3604.82 4605.61,3596.04 4605.61,3558.61 4614.4,3549.82 4654.57,3549.82 4657.5,3546.89 4657.5,3487.93 4654.57,3485 ; CAMARA2.09@4620,3485 4654.57,3485